# Allegro board QF7.820.6081-240911.brd
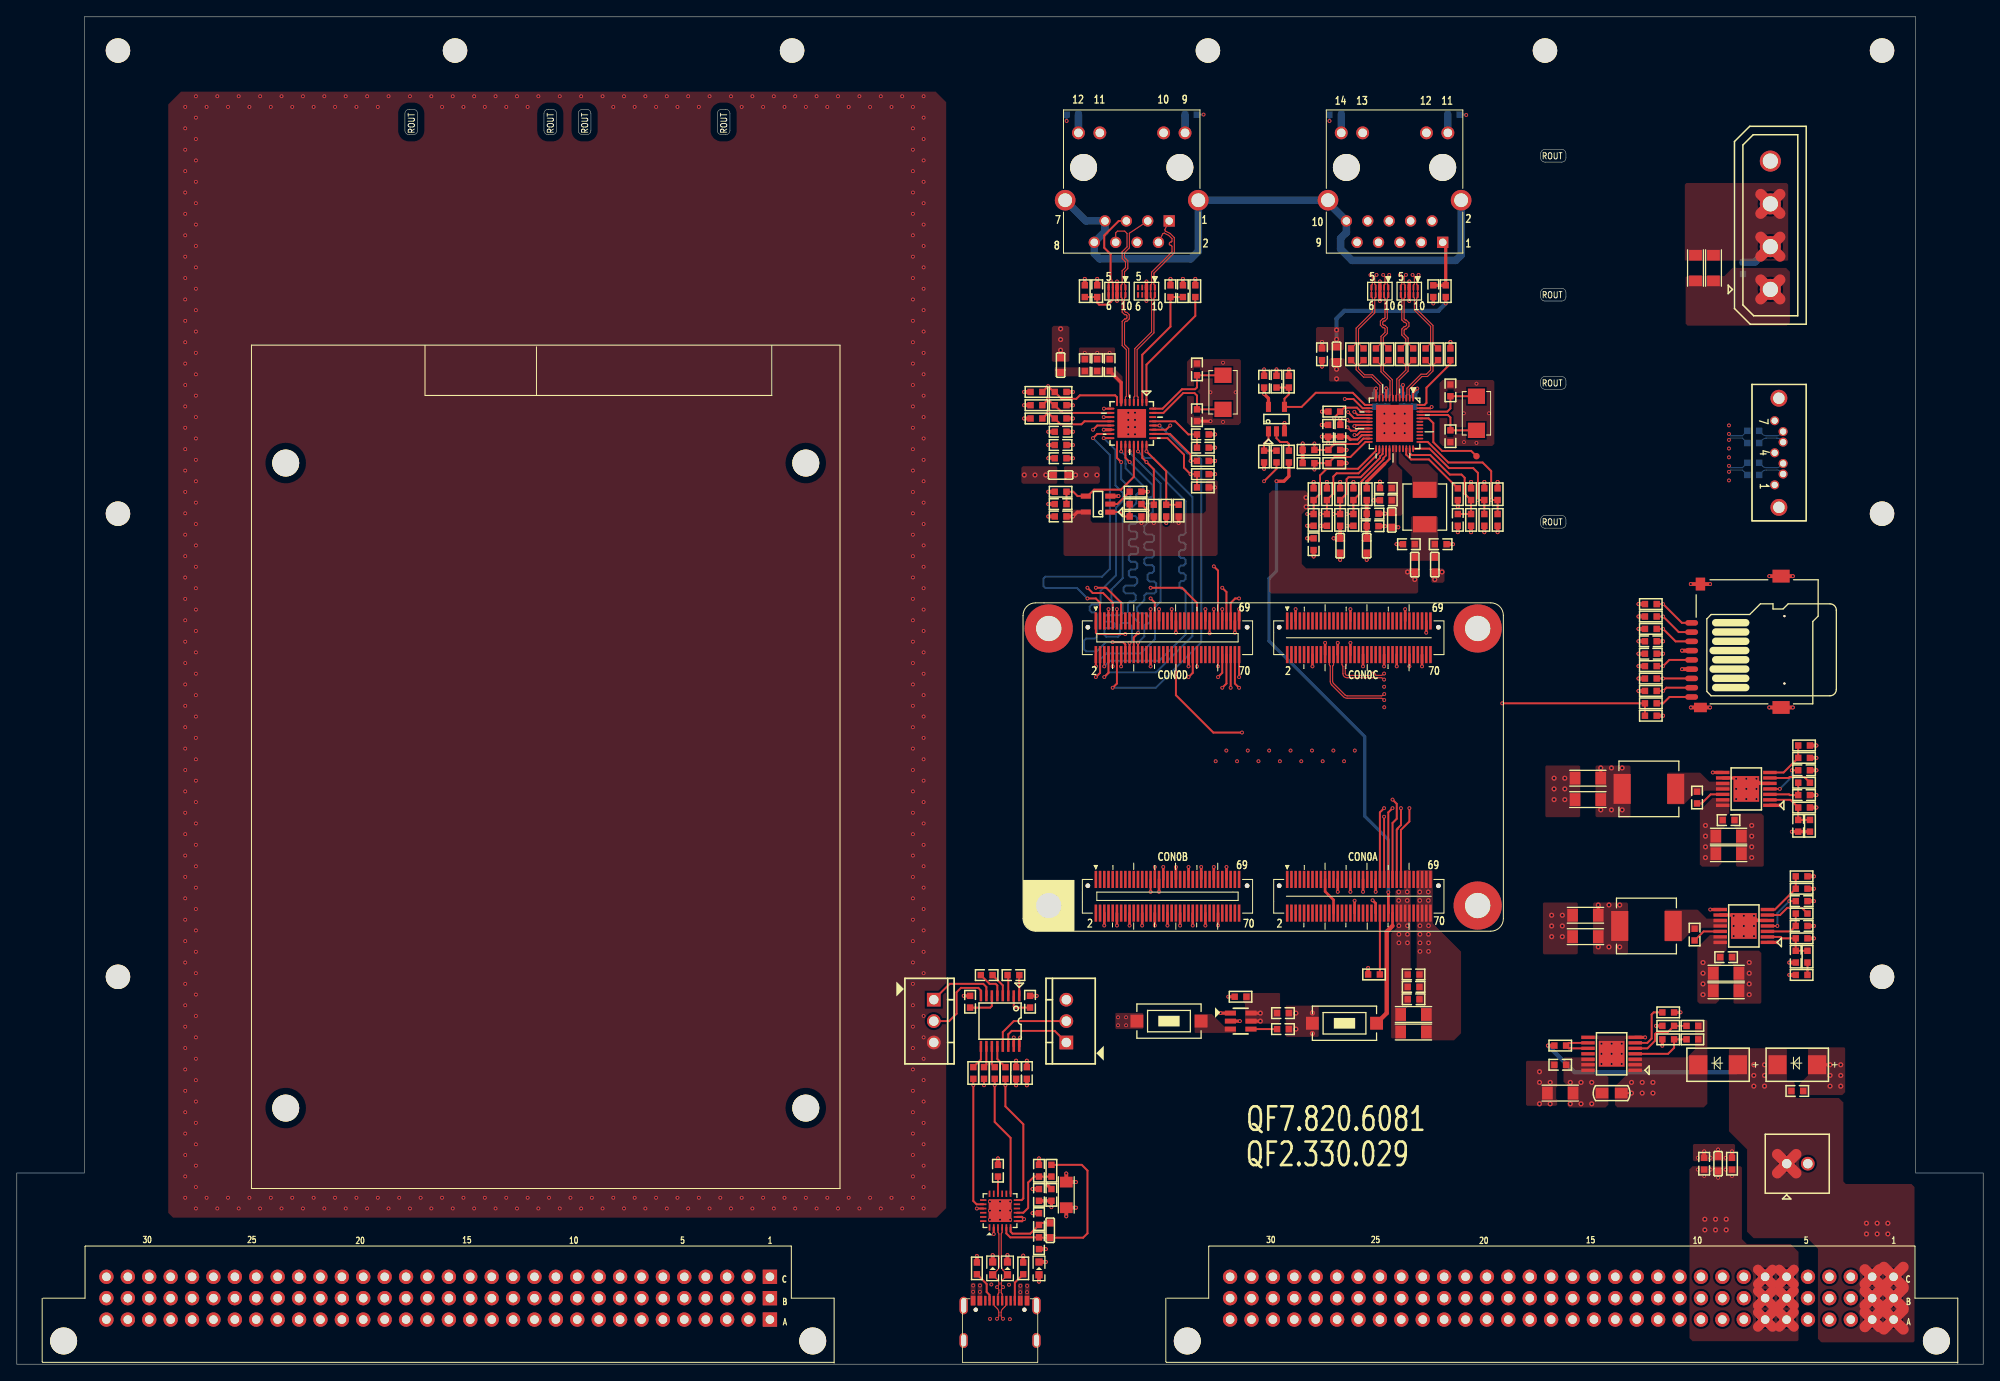
[diagram p0: board, top side]
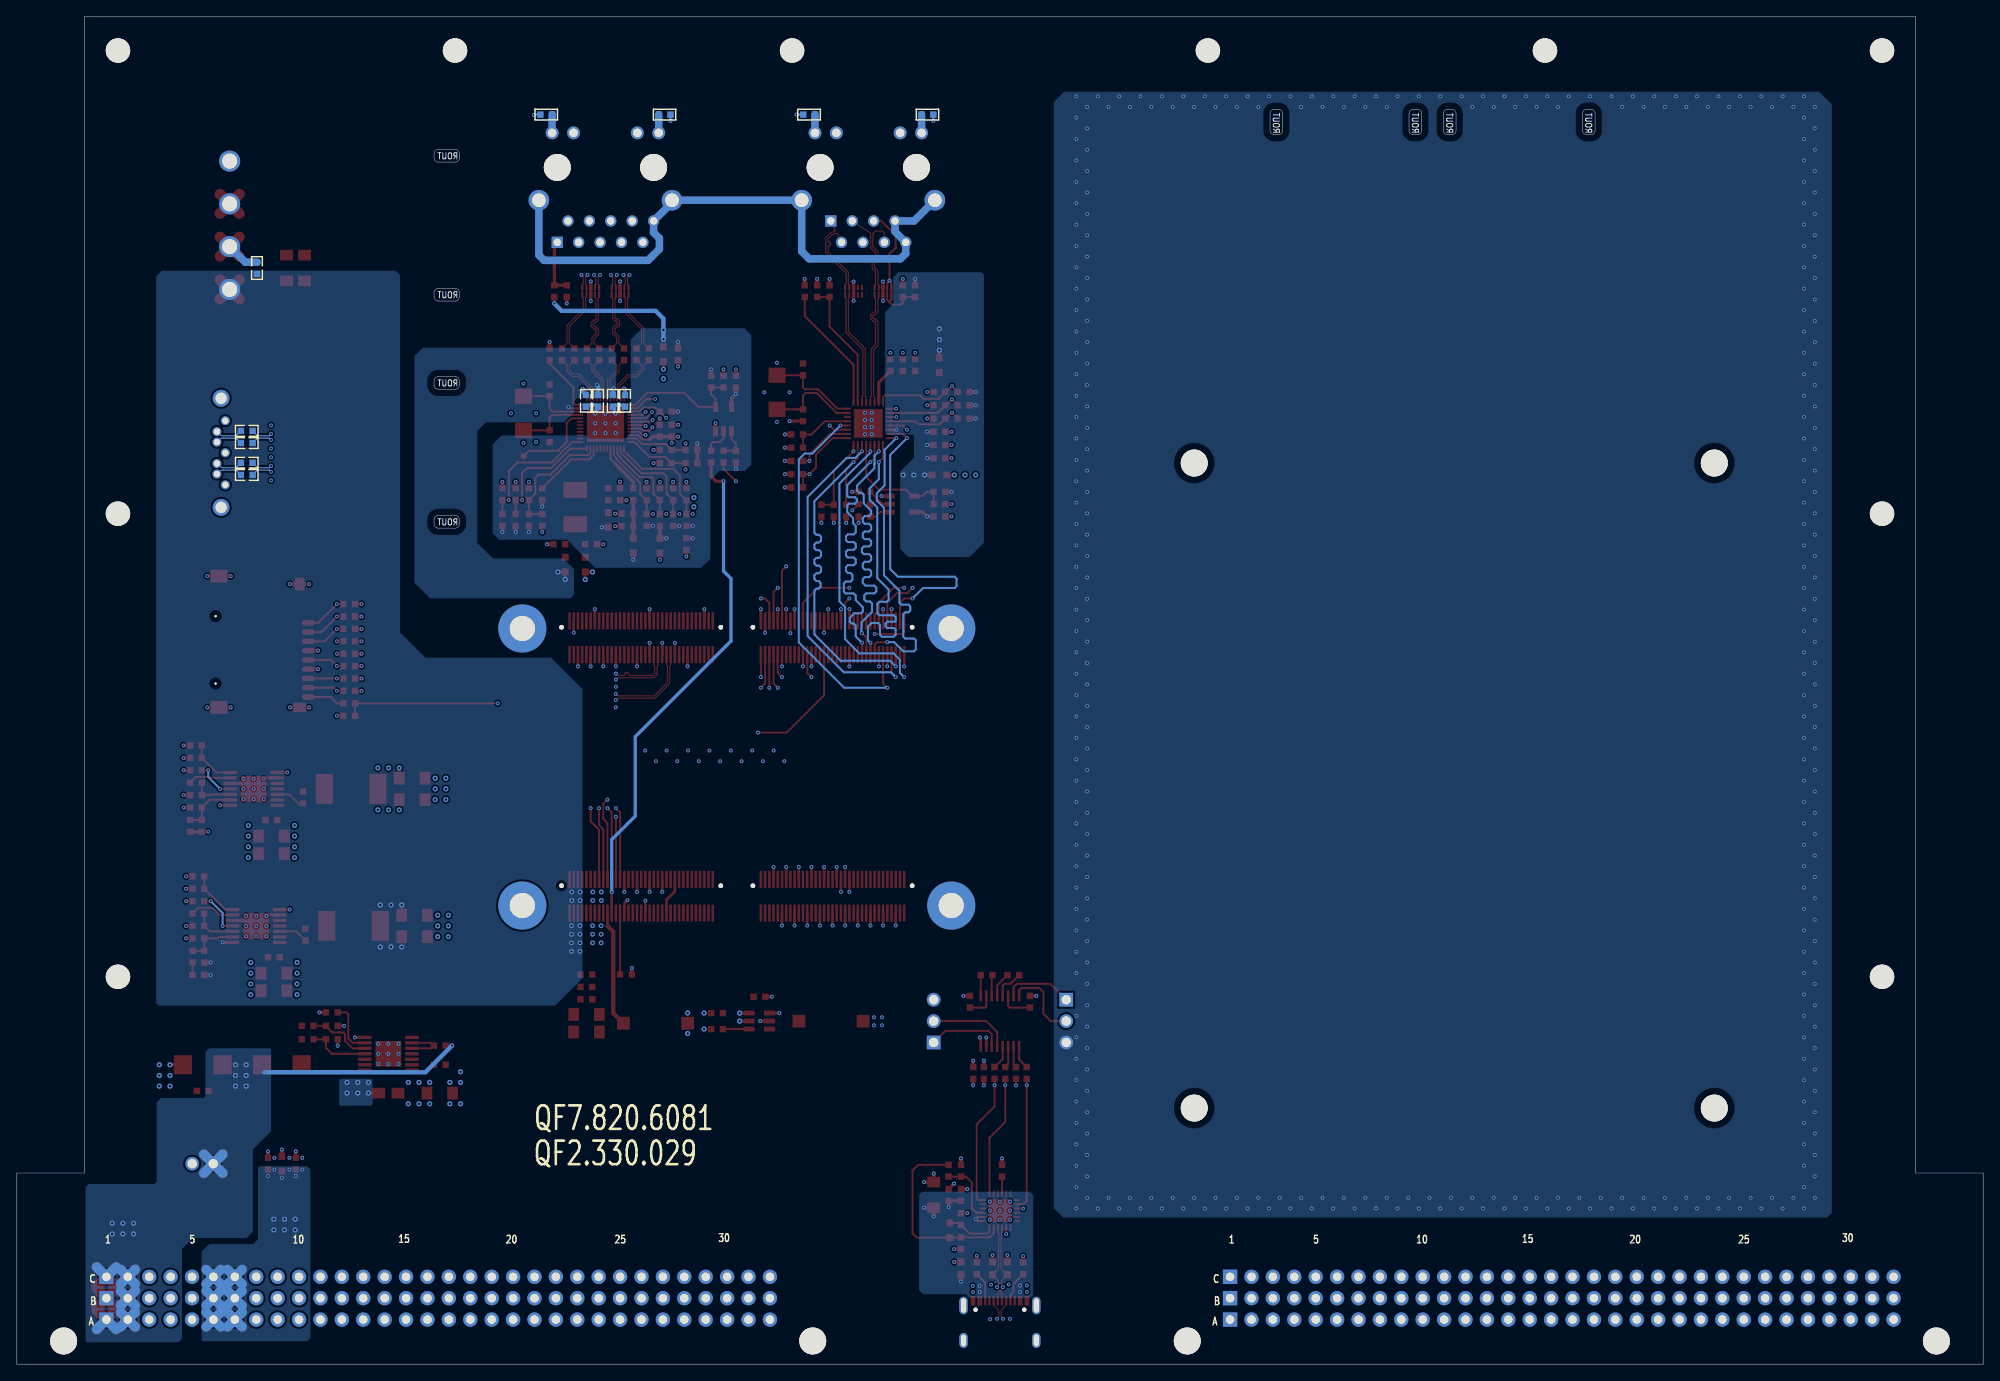
[diagram p1: board, bottom side, seen from below]

Outline 233.35 x 160 mm; copper layers: TOP, L2_GND, L3_VCC, L4-S, L5-GND, BOTTOM. Coordinates in mm from the lower left corner of the outline.
Outline path: 0,22.7 8,22.7 8,160 225.35,160 225.35,22.7 233.35,22.7 233.35,0 0,0 0,22.7 ; 46.05,148.51 46.05,146.51 arc(46.2,146.16) 46.55,146.01 47.05,146.01 arc(47.41,146.16) 47.55,146.51 47.55,148.51 arc(47.41,148.87) 47.05,149.01 46.55,149.01 arc(46.2,148.87) 46.05,148.51 ; 62.55,148.51 62.55,146.51 arc(62.7,146.16) 63.05,146.01 63.55,146.01 arc(63.91,146.16) 64.05,146.51 64.05,148.51 arc(63.91,148.87) 63.55,149.01 63.05,149.01 arc(62.7,148.87) 62.55,148.51 ; 66.63,148.51 arc(66.77,148.87) 67.13,149.01 67.63,149.01 arc(67.98,148.87) 68.13,148.51 68.13,146.51 arc(67.98,146.16) 67.63,146.01 67.13,146.01 arc(66.77,146.16) 66.63,146.51 66.63,148.51 ; 83.13,148.51 arc(83.27,148.87) 83.63,149.01 84.13,149.01 arc(84.48,148.87) 84.63,148.51 84.63,146.51 arc(84.48,146.16) 84.13,146.01 83.63,146.01 arc(83.27,146.16) 83.13,146.51 83.13,148.51 ; 180.84,143.75 180.84,143.25 arc(180.99,142.9) 181.34,142.75 183.34,142.75 arc(183.69,142.9) 183.84,143.25 183.84,143.75 arc(183.69,144.1) 183.34,144.25 181.34,144.25 arc(180.99,144.1) 180.84,143.75 ; 180.84,127.25 180.84,126.75 arc(180.99,126.4) 181.34,126.25 183.34,126.25 arc(183.69,126.4) 183.84,126.75 183.84,127.25 arc(183.69,127.6) 183.34,127.75 181.34,127.75 arc(180.99,127.6) 180.84,127.25 ; 180.84,116.78 180.84,116.28 arc(180.99,115.93) 181.34,115.78 183.34,115.78 arc(183.69,115.93) 183.84,116.28 183.84,116.78 arc(183.69,117.13) 183.34,117.28 181.34,117.28 arc(180.99,117.13) 180.84,116.78 ; 180.84,100.28 180.84,99.78 arc(180.99,99.43) 181.34,99.28 183.34,99.28 arc(183.69,99.43) 183.84,99.78 183.84,100.28 arc(183.69,100.63) 183.34,100.78 181.34,100.78 arc(180.99,100.63) 180.84,100.28

## Design rules (mm)
net group AA8/SATA_ESRXP: nets AA8/SATA_ESRXP N17010668
net group AA9/SATA_ESTXP: nets AA9/SATA_ESTXP N17010666
net group AB8/SATA_ESRXM: nets AB8/SATA_ESRXM N17010683
net group AB9/SATA_ESTXM: nets AB9/SATA_ESTXM N17010685
net group DP10: nets USB_D+ USB_D-
net group DP15: nets N15533886 N15533898
net group DP16: nets N15533888 N15533896
net group DP17: nets N15533890 N15533892
net group DP18: nets N15533884 N15533894
net group DP13: nets MDI1_P_D
net group POWER: nets AGND_AUDIO N15533766 N15534212 N15534402 N15538041 N16901725 N17001968 PMIC_PWRON SYS_RESETN/3V3 VDD_3V0_RTC VDD_3V3_DRG

## Placement (name value [footprint] x y rotation side)
C1  1u/25V  [C0603]  183.16 35.56 0 top
C2  22uF/25V  [C1206]  183.16 32.19 180 top
C3  1u/25V  [C0603]  211.29 32.44 180 top
C4  22uF/25V  [C1206]  202.85 46.42 0 top
C5  22uF/25V  [C1206]  202.85 44.34 0 top
C6  0.1u/50V  [C0603]  202.85 48.33 180 top
C7  22pF  [C0603]  211.11 48.39 270 top
C8  0.1u  [C0603]  199.11 51.01 270 top
C9  22uF  [C1206]  186.15 53.31 180 top
C10  22uF  [C1206]  186.15 50.77 180 top
C11  1u  [C0603]  211.81 52.04 180 top
C12  10nF  [C0603]  211.81 54.98 180 top
C13  22uF/25V  [C1206]  203.14 62.7 0 top
C14  22uF/25V  [C1206]  203.14 60.62 0 top
C15  0.1u/50V  [C0603]  203.14 64.61 180 top
C16  22pF  [C0603]  211.4 63.93 270 top
C17  22uF  [C1206]  186.44 67.04 180 top
C18  22uF  [C1206]  186.44 69.58 180 top
C19  0.1u  [C0603]  199.4 67.29 270 top
C20  1u  [C0603]  212.1 67.58 180 top
C21  10nF  [C0603]  212.1 70.52 180 top
C22  0.1u  [C0603]  165.76 44.8 180 top
C23  0.1u  [C0603]  165.76 46.28 180 top
C24  0.1u  [C0603]  165.76 43.33 180 top
C25  47u/16V  [C1206]  165.75 41.53 180 top
C26  47u/16V  [C1206]  165.75 39.44 180 top
C27  0.1u  [C0603]  150.25 41.69 180 top
C28  10nF  [C0603]  150.25 39.79 180 top
C29  10uF_25V  [C0603]  118.59 34.58 90 top
C30  0.1uF,25V  [C0603]  119.86 34.58 90 top
C31  0.1uF,25V  [C0603]  118.27 46.2 180 top
C32  0.1uF,25V  [C0603]  115.09 46.2 180 top
C33  0.1uF,25V  [C0603]  120.24 43.04 90 top
C34  0.1uF,25V  [C0603]  113.13 43.04 90 top
C35  4.7uF_16V  [C0603]  121.3 17.23 90 top
C36  100nF  [C0603]  121.3 14.36 270 top
C37  4.7uF_16V  [C0603]  116.43 22.97 90 top
C38  10uF_16V  [C1206]  124.54 20.1 90 top
C39  100nF  [C0603]  121.3 20.1 90 top
C40  100nF  [C0603]  122.78 20.1 90 top
C41  1uF_16V  [C0603]  121.3 22.97 90 top
C42  10nF  [C0603]  206.06 105.6 0 bottom
C43  10nF  [C0603]  206.06 107.05 0 bottom
C44  10nF  [C0603]  206.06 109.39 0 bottom
C45  10nF  [C0603]  206.06 110.84 0 bottom
C46  0.1u  [C0603]  193.91 84.37 180 top
C47  10uF  [C0603]  193.91 85.84 180 top
C48  47u/16V  [C1206]  201.35 130.17 90 top
C49  47u/16V  [C1206]  199.21 130.17 90 top
C50  0.1u  [C0603]  204.85 130.17 90 bottom
C51  0.1u  [C0603]  168.1 127.42 90 top
C52  12pF  [C0603]  170.13 115.64 270 top
C53  12pF  [C0603]  170.13 110.2 90 top
C54  0.1u  [C0603]  148.02 116.68 90 top
C55  10uF  [C0603]  168.97 97.37 0 top
C56  0.1u  [C0603]  165.2 97.37 180 top
C57  0.1u  [C0603]  171 100.26 270 top
C58  1u  [C0603]  149.49 116.68 90 top
C59  10uF  [C0603]  161.18 114.4 270 bottom
C60  0.1u  [C0603]  165.82 114.4 270 bottom
C61  10uF  [C0603]  162.47 102.59 180 top
C62  0.1u  [C0603]  162.47 104.04 180 top
C63  10uF  [C0603]  160.89 101 0 top
C64  0.1u  [C0603]  160.89 99.52 0 top
C65  10uF  [C0603]  153.89 97.37 270 top
C66  0.1u  [C0603]  154.89 119.93 270 top
C67  10uF  [C0603]  162.62 114.4 270 bottom
C68  0.1u  [C0603]  164.38 114.4 270 bottom
C69  10uF  [C0603]  157.07 110.85 90 top
C70  0.1u  [C0603]  155.62 110.85 90 top
C71  12pF  [C0603]  140.05 118.13 270 top
C72  12pF  [C0603]  140.05 112.69 90 top
C73  10uF  [C0603]  129.68 118.64 90 top
C74  0.1u  [C0603]  126.74 118.64 90 top
C75  1u  [C0603]  128.21 118.64 270 top
C76  10uF  [C0603]  123.87 107.58 180 top
C77  0.1u  [C0603]  123.87 110.73 180 top
C78  1u  [C0603]  123.87 109.15 0 top
C79  0.1u  [C0603]  140.75 110.41 0 top
C80  1u  [C0603]  140.75 108.84 180 top
C81  0.1u  [C0603]  138.38 127.42 90 top
C82  1u  [C0603]  136.9 127.42 270 top
C83  0.1u  [C0603]  123.87 100.67 180 top
C84  1u  [C0603]  123.87 102.14 180 top
C85  0.1u  [C0603]  128.21 127.42 90 top
C86  1000p  [C0603]  200.24 23.81 90 top
CON1  SOM-TLT3_A40i  [SOM-TLA40I-B]  147.91 70.91 0 top
D1  TPS3808G33DBVR  [SOT23_6]  145.24 40.74 270 top
D2  SIT3232EEUE  [TSSOP16]  116.68 40.74 180 top
D3  CP2105-F01-GM  [QFN-24]  116.68 18.23 90 top
D4  YT8521SH-CA  [QFN48]  163.5 111.72 180 top
D5  NC7SZ08M5  [SOT23_5]  149.49 112.23 0 top
D6  YT8512H  [QFN32]  132.31 111.72 180 top
D7  NC7SZ08M5  [SOT23_5]  128.31 102.14 90 top
FB1  220R_100MHz_2A  [FB0603]  122.63 15.9 270 top
FB2  BLM18PG121SN1  [FB0603]  201.89 23.81 270 top
FB3  BLM18PG121SN1  [FB0603]  157.04 97.2 90 top
FB4  BLM18PG121SN1  [FB0603]  165.9 94.95 270 top
FB5  BLM18PG121SN1  [FB0603]  160.19 97.2 90 top
FB6  BLM18PG121SN1  [FB0603]  163.16 100.26 90 top
FB7  BLM18PG121SN1  [FB0603]  168.27 94.95 270 top
FB8  BLM18PG121SN1  [FB0603]  156.62 119.93 270 top
FB9  BLM18PG121SN1/nc  [FB0603]  123.87 105.59 0 top
FB10  BLM18PG121SN1  [FB0603]  123.87 118.64 270 top
J1  XH254-2  [XH254_2_0]  211.29 23.81 0 top
J2  CON3  [XH254-3]  124.55 40.74 0 top
J3  CON3  [XH254-3]  108.82 40.74 180 top
J4  KH-TYPE-C-16P  [TYPE-C_16P_90_SMD]  116.68 3.99 0 top
J5  SATA_7PIN_DIP  [CON_SATA_7PIN]  209.11 114.71 270 top
J6  SATA_IDE_DIP_4Pin  [SATA-IDE4M_5R08_DIP]  208.1 127.63 90 top
J7  TF  [TF-CARD-A]  206.78 85.78 90 top
J8  -  [HR915320AE]  163.5 148.94 0 top
J9  -  [HR915310AE]  132.31 148.94 0 top
L1  SPM6530T-3R3  [SPM6530]  193.39 52.04 180 top
L2  SPM6530T-2R2  [SPM6530]  193.68 68.31 180 top
L3  MWSA0420S-2R2MT  [SMD_LDPC0530RCP]  167.08 101.79 270 top
NOREF  -  [unnamed]  181.35 156 0 top
NOREF#2  -  [unnamed]  12 46 0 top
NOREF#3  -  [unnamed]  221.35 101 0 top
NOREF#4  -  [unnamed]  12 156 0 top
NOREF#5  -  [unnamed]  52 156 0 top
NOREF#6  -  [unnamed#2]  62.77 121.01 180 top
NOREF#7  -  [unnamed]  221.35 46 0 top
NOREF#8  -  [unnamed]  92 156 0 top
NOREF#9  -  [unnamed]  141.35 156 0 top
NOREF#10  -  [unnamed]  221.35 156 0 top
NOREF#11  -  [unnamed]  12 101 0 top
R1  2.2M  [R0603]  198.85 40.17 0 top
R2  2.2M  [R0603]  198.85 38.57 0 top
R3  10K  [R0603]  183.16 37.83 0 top
R4  5.6K  [R0603]  195.97 41.77 180 top
R5  240K  [R0603]  195.97 40.17 0 top
R6  560K  [R0603]  195.97 38.57 0 top
R7  0R  [R0603]  211.81 46.22 180 top
R8  124K  [R0603]  212.5 48.39 270 top
R9  22.1K  [R0603]  211.81 50.57 180 top
R10  90.9K  [R0603]  211.81 57.93 0 top
R11  30.1K  [R0603]  211.81 56.46 180 top
R12  73.2K  [R0603]  212.8 63.93 270 top
R13  22.1K  [R0603]  212.1 66.1 180 top
R14  90.9K  [R0603]  212.1 73.47 0 top
R15  30.1K  [R0603]  212.1 72 180 top
R16  0R/NC  [R0603]  161.06 46.28 0 top
R17  10K  [R0603]  145.22 43.64 0 top
R18  0/nc  [R0603]  116.05 34.58 270 top
R19  0/nc  [R0603]  117.32 34.58 270 top
R20  0/nc  [R0603]  114.78 34.58 270 top
R21  0/nc  [R0603]  113.51 34.58 270 top
R22  5.1K_1%  [R0603]  113.93 11.38 90 top
R23  5.1K_1%  [R0603]  119.43 11.38 90 top
R24  10K_1%  [R0603]  122.78 22.97 270 top
R25  10K  [R0603]  193.91 77 180 top
R26  10K  [R0603]  193.91 79.95 0 top
R27  10K  [R0603]  193.91 81.42 0 top
R28  10K  [R0603]  193.91 82.9 0 top
R29  10K  [R0603]  193.91 87.32 0 top
R30  10K  [R0603]  193.91 88.79 0 top
R31  10K  [R0603]  193.91 90.26 0 top
R32  33R  [R0603]  193.91 78.48 0 top
R33  DNP_4K7_1%  [R0603]  171 103.31 270 top
R34  0R  [R0603]  160.19 103.31 270 top
R35  4.7K  [R0603]  156.34 113.12 0 top
R36  DNP_0R_1%  [R0603]  169.57 127.42 90 top
R37  0R  [R0603]  168.66 119.93 90 top
R38  0R  [R0603]  167.18 119.93 90 top
R39  0R  [R0603]  164.24 119.93 90 top
R40  0R  [R0603]  161.29 119.93 90 top
R41  0R  [R0603]  165.71 119.93 90 top
R42  0R  [R0603]  162.76 119.93 90 top
R43  0R  [R0603]  159.82 119.93 90 top
R44  0R  [R0603]  158.34 119.93 90 top
R45  330R  [R0603]  170.52 148.39 180 bottom
R46  NC  [R0603]  156.48 148.39 0 bottom
R47  10K  [R0603]  148.01 107.79 270 top
R48  2K49  [R0603]  170.13 119.93 270 top
R49  0R  [R0603]  150.96 107.79 90 top
R50  10K  [R0603]  150.95 116.68 90 top
R51  DNP_4K7_1%  [R0603]  157.04 100.26 270 top
R52  DNP_4K7_1%  [R0603]  158.62 100.26 270 top
R53  DNP_4K7_1%  [R0603]  172.58 100.26 270 top
R54  4.7K  [R0603]  157.04 103.31 270 top
R55  4.7K  [R0603]  158.62 103.31 270 top
R56  4.7K  [R0603]  172.58 103.31 270 top
R57  DNP_4K7_1%  [R0603]  153.89 100.26 270 top
R58  DNP_4K7_1%  [R0603]  153.29 107 180 top
R59  DNP_4K7_1%  [R0603]  153.29 108.57 180 top
R60  DNP_4K7_1%  [R0603]  174.15 100.26 270 top
R61  DNP_4K7_1%  [R0603]  175.73 100.26 270 top
R62  4.7K  [R0603]  155.47 100.26 270 top
R63  4.7K  [R0603]  153.89 103.31 270 top
R64  4.7K  [R0603]  156.34 107 180 top
R65  4.7K  [R0603]  156.34 108.57 180 top
R66  4.7K  [R0603]  174.15 103.31 270 top
R67  4.7K  [R0603]  175.73 103.31 270 top
R68  DNP_4K7_1%  [R0603]  155.47 103.31 270 top
R69  2K49  [R0603]  139.85 127.42 90 top
R70  10K  [R0603]  132.76 100.66 0 top
R71  10K  [R0603]  123.87 103.6 0 top
R72  0R  [R0603]  132.76 103.61 180 top
R73  DNP_0R_1%  [R0603]  126.74 127.42 90 top
R74  4.7K  [R0603]  140.75 107.26 0 top
R75  4.7K  [R0603]  134.93 101.36 90 top
R76  NC  [R0603]  125.28 148.39 0 bottom
R77  DNP_4K7_1%  [R0603]  137.88 101.36 270 top
R78  DNP_4K7_1%  [R0603]  140.75 104.11 0 top
R79  330R  [R0603]  139.33 148.39 180 bottom
R80  4.7K  [R0603]  136.4 101.36 90 top
R81  4.7K  [R0603]  140.75 105.69 180 top
R82  DNP_4K7_1%  [R0603]  121 115.45 180 top
R83  DNP_4K7_1%  [R0603]  121 112.3 180 top
R84  DNP_4K7_1%  [R0603]  121 113.88 180 top
R85  4.7K  [R0603]  123.87 115.45 0 top
R86  4.7K  [R0603]  123.87 112.3 0 top
R87  4.7K  [R0603]  123.87 113.88 0 top
R88  1M  [R0603]  203.55 23.81 90 top
R90  NC/10K  [R0603]  211.81 53.51 0 top
R91  NC/10K  [R0603]  212.1 69.05 0 top
R126  0R  [R0603]  149.49 107.79 90 top
R149  0R  [R0603]  132.76 102.14 180 top
RJ1  0R/NC  [R0805]  188.11 32.19 0 top
SW1  BTN  [SMD-BTN-2]  157.56 40.48 180 top
SW2  BTN  [SMD-BTN-2]  136.73 40.74 0 top
TP1  DNP_TP30  [TP30]  173.22 107.83 0 top
U1  MAX14571EUD+T  [TSSOP14_TP]  192.06 34.91 180 top
U2  TPS54626PWP  [TSSOP14_TP]  207.75 50.09 180 top
U3  TPS54626PWP  [TSSOP14_TP]  208.04 66.36 180 top
V1  SMBJ12CA  [D1808A]  208.94 35.56 0 top
V2  PESDALC10N5VU  [DFN-10-2510]  165.24 127.42 180 top
V3  PESDALC10N5VU  [DFN-10-2510]  161.75 127.42 180 top
V4  PESDALC10N5VU  [DFN-10-2510]  134.05 127.42 180 top
V5  PESDALC10N5VU  [DFN-10-2510]  130.56 127.42 180 top
V6  SS34  [D1808A]  199.54 35.56 0 top
V13  PESD5V0  [LED0603]  121.3 11.38 90 top
V14  PESD5V0  [LED0603]  117.56 11.38 90 top
V15  PESD5V0  [LED0603]  115.81 11.38 90 top
X1  DIN96  [9001-1396]  138.9 2.75 0 top
X2  DIN96  [9001-1396]  5.55 2.75 0 top
Y1  X53T-G20SSA-25MHz-C  [OSC_5032]  173.22 112.92 270 top
Y2  X53T-G20SSA-25MHz-C  [OSC_5032]  143.14 115.41 270 top

## Library data of the parts
C1 C3 C6-C8 C11 C12 C15 C16 C19-C24 C27 C28 C35-C41 C85 C86 = CAPACITOR NON-POL
C2 C4 C5 C9 C10 C13 C14 C17 C18 C25 C26 C48 C49 = CAP
C29-C34 C46 C47 C50-C53 C71 C72 = CAP NP
C42-C45 = CAP NP: signal model: 0603
C54-C70 C73 C74 C76 C77 C79 C81 C83 C84 = 11_C_0
C75 C78 C80 C82 = CAP_C53
CON1 = SOM-TLT3_A40i-B_1
D1 = TPS3808
D2 = MAX232A_0
D3 = CP2105_4
D4 = YT8521S
D5 = 74LVC1G08
D6 = YT8512H_1: room: 6
D7 = 74LVC1G08: room: 6
FB1-FB10 = FERRITE BEAD
J1 = CON2
J2 J3 = CON3
J4 = usb 3_0.0 type-c female: room: 10
J5 = SATA-VERT
J6 = SATA_IDE_DIP_0: room: 4
J7 = TF
J8 = KRJ-320DNL_2: room: ecat1
J9 = ETHERNET CONNECTER
L1 L2 = INDUCTOR IRON
L3 = 1211_CHOKE_0: User Part Number: HAMP; Tolerance: #TOL
R1-R15 R17 R79 R90 R91 = R
R16 R22 R23 = R 1%
R18-R21 R24-R31 R38-R42 R45-R49 R69 R70 R72 R126 R149 = 10_R_0
R32 R36 R37 R43 R44 = 10_R_0: room: RS232
R33-R35 = 0R 1%/0402: room: RS232
R50-R68 R71 R74 R75 R77 R78 R82-R86 RJ1 = 0R 1%/0402
R73 = 1R_ZeroOhmResistor1/16W0402
R76 R88 = R: room: JTAG
R80 R81 R87 = 0R 1%/0402: room: JTAG
SW1 SW2 = SW PUSHBUTTON
TP1 = T POINT R
U1 = MAX14571_0
U2 U3 = TPS54626
V1 V6 = SCHOTTKY
V2-V5 = SU099PGTR
V13-V15 = ZENOR_0
X1 X2 = DIN96
Y1 Y2 = ZTB

## Footprints (pads in the part's own frame, mm; a bottom-side part is the same pattern mirrored in y, then rotated)
9001-1396
  round 3.2 hole 3.2 unplated: (0,0) (88.9,0)
  rect 1.7x1.7 hole 1.016: 1(83.82,2.54) 33(83.82,5.08) 65(83.82,7.62)
  round 1.7 hole 1.016: 2(81.28,2.54) 3(78.74,2.54) 4(76.2,2.54) 5(73.66,2.54) 6(71.12,2.54) 7(68.58,2.54) 8(66.04,2.54) 9(63.5,2.54) 10(60.96,2.54) 11(58.42,2.54) 12(55.88,2.54) 13(53.34,2.54) 14(50.8,2.54) 15(48.26,2.54) 16(45.72,2.54) 17(43.18,2.54) 18(40.64,2.54) 19(38.1,2.54) 20(35.56,2.54) 21(33.02,2.54) 22(30.48,2.54) 23(27.94,2.54) 24(25.4,2.54) 25(22.86,2.54) 26(20.32,2.54) 27(17.78,2.54) 28(15.24,2.54) 29(12.7,2.54) 30(10.16,2.54) 31(7.62,2.54) 32(5.08,2.54) 34(81.28,5.08) 35(78.74,5.08) 36(76.2,5.08) 37(73.66,5.08) 38(71.12,5.08) 39(68.58,5.08) 40(66.04,5.08) 41(63.5,5.08) 42(60.96,5.08) 43(58.42,5.08) 44(55.88,5.08) 45(53.34,5.08) 46(50.8,5.08) 47(48.26,5.08) 48(45.72,5.08) 49(43.18,5.08) 50(40.64,5.08) 51(38.1,5.08) 52(35.56,5.08) 53(33.02,5.08) 54(30.48,5.08) 55(27.94,5.08) 56(25.4,5.08) 57(22.86,5.08) 58(20.32,5.08) 59(17.78,5.08) 60(15.24,5.08) 61(12.7,5.08) 62(10.16,5.08) 63(7.62,5.08) 64(5.08,5.08) 66(81.28,7.62) 67(78.74,7.62) 68(76.2,7.62) 69(73.66,7.62) 70(71.12,7.62) 71(68.58,7.62) 72(66.04,7.62) 73(63.5,7.62) 74(60.96,7.62) 75(58.42,7.62) 76(55.88,7.62) 77(53.34,7.62) 78(50.8,7.62) 79(48.26,7.62) 80(45.72,7.62) 81(43.18,7.62) 82(40.64,7.62) 83(38.1,7.62) 84(35.56,7.62) 85(33.02,7.62) 86(30.48,7.62) 87(27.94,7.62) 88(25.4,7.62) 89(22.86,7.62) 90(20.32,7.62) 91(17.78,7.62) 92(15.24,7.62) 93(12.7,7.62) 94(10.16,7.62) 95(7.62,7.62) 96(5.08,7.62)
C0603
  rect 0.762x0.762 smd: 1(-0.699,0) 2(0.699,0)
C1206
  rect 1.27x1.524 smd: 1(-1.524,0) 2(1.524,0)
CON_SATA_7PIN
  round 2 hole 1.35: (0,0) (12.96,0)
  round 1.07 hole 0.75: 1(10.29,-0.5) 2(9,0.5) 3(7.75,0.5) 4(6.48,-0.5) 5(5.21,0.5) 6(3.96,0.5) 7(2.67,-0.5)
D1808A
  rect 2.16x2.26 smd: 1(0,0) 2(4.7,0)
DFN-10-2510
  rect 0.254x0.66 smd: 1(-1,-0.437) 5(1,-0.437) 6(1,0.437) 10(-1,0.437)
  rect 0.203x0.66 smd: 2(-0.5,-0.437) 4(0.5,-0.437) 7(0.5,0.437) 9(-0.5,0.437)
  rect 0.406x0.66 smd: 3(0,-0.437) 8(0,0.437)
FB0603
  rect 0.85x0.8 smd: 1(-0.875,0) 2(0.875,0)
HR915310AE
  round 3.2 hole 3.2 unplated: (-5.715,-6.83) (5.715,-6.83)
  rect 1.34x1.34 hole 0.89: 1(4.445,-13.18)
  round 1.34 hole 0.89: 2(3.175,-15.72) 3(1.905,-13.18) 4(0.635,-15.72) 5(-0.635,-13.18) 6(-1.905,-15.72) 7(-3.175,-13.18) 8(-4.445,-15.72)
  round 1.53 hole 1.02: 9(6.325,-2.72) 10(3.785,-2.72) 11(-3.785,-2.72) 12(-6.325,-2.72)
  round 2.45 hole 1.63: 15(-7.9,-10.72) 16(7.9,-10.72)
HR915320AE
  round 3.2 hole 3.2 unplated: (-5.715,-6.83) (5.715,-6.83)
  rect 1.34x1.34 hole 0.89: 1(5.715,-15.72)
  round 1.34 hole 0.89: 2(4.445,-13.18) 3(3.175,-15.72) 4(1.905,-13.18) 5(0.635,-15.72) 6(-0.635,-13.18) 7(-1.905,-15.72) 8(-3.175,-13.18) 9(-4.445,-15.72) 10(-5.715,-13.18)
  round 1.53 hole 1.02: 11(6.325,-2.72) 12(3.785,-2.72) 13(-3.785,-2.72) 14(-6.325,-2.72)
  round 2.45 hole 1.63: 17(-7.9,-10.72) 18(7.9,-10.72)
LED0603
  rect 0.864x0.864 smd: 1(-0.762,0) 2(0.762,0)
OSC_5032
  rect 1.82x2.03 smd: 1(-2.024,0) 2(2.024,0)
QFN32
  custom 0.23x0.85 smd: 1(-1.75,-2.475) 2(-1.25,-2.475) 3(-0.75,-2.475) 4(-0.25,-2.475) 5(0.25,-2.475) 6(0.75,-2.475) 7(1.25,-2.475) 8(1.75,-2.475) 17(1.75,2.475) 18(1.25,2.475) 19(0.75,2.475) 20(0.25,2.475) 21(-0.25,2.475) 22(-0.75,2.475) 23(-1.25,2.475) 24(-1.75,2.475)
  custom 0.85x0.23 smd: 9(2.475,-1.75) 10(2.475,-1.25) 11(2.475,-0.75) 12(2.475,-0.25) 13(2.475,0.25) 14(2.475,0.75) 15(2.475,1.25) 16(2.475,1.75) 25(-2.475,1.75) 26(-2.475,1.25) 27(-2.475,0.75) 28(-2.475,0.25) 29(-2.475,-0.25) 30(-2.475,-0.75) 31(-2.475,-1.25) 32(-2.475,-1.75)
  rect 3.4x3.4 smd: 33(0,0)
QFN48
  oval 0.203x0.813 smd: 1(-2.2,-3) 2(-1.8,-3) 3(-1.4,-3) 4(-1,-3) 5(-0.6,-3) 6(-0.2,-3) 7(0.2,-3) 8(0.6,-3) 9(1,-3) 10(1.4,-3) 11(1.8,-3) 12(2.2,-3) 25(2.2,3) 26(1.8,3) 27(1.4,3) 28(1,3) 29(0.6,3) 30(0.2,3) 31(-0.2,3) 32(-0.6,3) 33(-1,3) 34(-1.4,3) 35(-1.8,3) 36(-2.2,3)
  oval 0.813x0.203 smd: 13(3,-2.2) 14(3,-1.8) 15(3,-1.4) 16(3,-1) 17(3,-0.6) 18(3,-0.2) 19(3,0.2) 20(3,0.6) 21(3,1) 22(3,1.4) 23(3,1.8) 24(3,2.2) 37(-3,2.2) 38(-3,1.8) 39(-3,1.4) 40(-3,1) 41(-3,0.6) 42(-3,0.2) 43(-3,-0.2) 44(-3,-0.6) 45(-3,-1) 46(-3,-1.4) 47(-3,-1.8) 48(-3,-2.2)
  rect 4.394x4.394 smd: 49(0,0)
QFN-24
  rect 0.75x0.2 smd: 1(-2,1.25) 2(-2,0.75) 3(-2,0.25) 4(-2,-0.25) 5(-2,-0.75) 6(-2,-1.25) 13(2,-1.25) 14(2,-0.75) 15(2,-0.25) 16(2,0.25) 17(2,0.75) 18(2,1.25)
  rect 0.2x0.75 smd: 7(-1.25,-2) 8(-0.75,-2) 9(-0.25,-2) 10(0.25,-2) 11(0.75,-2) 12(1.25,-2) 19(1.25,2) 20(0.75,2) 21(0.25,2) 22(-0.25,2) 23(-0.75,2) 24(-1.25,2)
  rect 2.7x2.7 smd: 25(0,0)
R0603
  rect 0.762x0.762 smd: 1(-0.699,0) 2(0.699,0)
R0805
  rect 1.524x1.27 smd: 1(0,0) 2(2.286,0)
SATA-IDE4M_5R08_DIP
  round 2.5 hole 1.8: 1(0,0) 2(5.08,0) 3(10.16,0) 4(15.24,0)
SMD-BTN-2
  rect 1.524x1.524 smd: 1(-3.81,0) 2(3.81,0)
SMD_LDPC0530RCP
  rect 1.905x2.794 smd: 1(-2.045,0) 2(2.045,0)
SOM-TLA40I-B
  round 0.55 hole 0.55 unplated: (-20.811,16.599) (-20.811,-14.099) (-1.912,16.599) (-1.912,-14.099) (1.897,16.599) (1.897,-14.099) (20.797,16.599) (20.797,-14.099)
  rect 0.305x2.032 smd: A1(2.847,-13.349) A2(2.847,-17.349) A3(3.347,-13.349) A4(3.347,-17.349) A5(3.847,-13.349) A6(3.847,-17.349) A7(4.347,-13.349) A8(4.347,-17.349) A9(4.847,-13.349) A10(4.847,-17.349) A11(5.347,-13.349) A12(5.347,-17.349) A13(5.847,-13.349) A14(5.847,-17.349) A15(6.347,-13.349) A16(6.347,-17.349) A17(6.847,-13.349) A18(6.847,-17.349) A19(7.347,-13.349) A20(7.347,-17.349) A21(7.847,-13.349) A22(7.847,-17.349) A23(8.347,-13.349) A24(8.347,-17.349) A25(8.847,-13.349) A26(8.847,-17.349) A27(9.347,-13.349) A28(9.347,-17.349) A29(9.847,-13.349) A30(9.847,-17.349) A31(10.347,-13.349) A32(10.347,-17.349) A33(10.847,-13.349) A34(10.847,-17.349) A35(11.347,-13.349) A36(11.347,-17.349) A37(11.847,-13.349) A38(11.847,-17.349) A39(12.347,-13.349) A40(12.347,-17.349) A41(12.847,-13.349) A42(12.847,-17.349) A43(13.347,-13.349) A44(13.347,-17.349) A45(13.847,-13.349) A46(13.847,-17.349) A47(14.347,-13.349) A48(14.347,-17.349) A49(14.847,-13.349) A50(14.847,-17.349) A51(15.347,-13.349) A52(15.347,-17.349) A53(15.847,-13.349) A54(15.847,-17.349) A55(16.347,-13.349) A56(16.347,-17.349) A57(16.847,-13.349) A58(16.847,-17.349) A59(17.347,-13.349) A60(17.347,-17.349) A61(17.847,-13.349) A62(17.847,-17.349) A63(18.347,-13.349) A64(18.347,-17.349) A65(18.847,-13.349) A66(18.847,-17.349) A67(19.347,-13.349) A68(19.347,-17.349) A69(19.847,-13.349) A70(19.847,-17.349) B1(-19.862,-13.349) B2(-19.862,-17.349) B3(-19.362,-13.349) B4(-19.362,-17.349) B5(-18.862,-13.349) B6(-18.862,-17.349) B7(-18.362,-13.349) B8(-18.362,-17.349) B9(-17.862,-13.349) B10(-17.862,-17.349) B11(-17.362,-13.349) B12(-17.362,-17.349) B13(-16.862,-13.349) B14(-16.862,-17.349) B15(-16.362,-13.349) B16(-16.362,-17.349) B17(-15.862,-13.349) B18(-15.862,-17.349) B19(-15.362,-13.349) B20(-15.362,-17.349) B21(-14.861,-13.349) B22(-14.861,-17.349) B23(-14.362,-13.349) B24(-14.362,-17.349) B25(-13.861,-13.349) B26(-13.861,-17.349) B27(-13.362,-13.349) B28(-13.362,-17.349) B29(-12.861,-13.349) B30(-12.861,-17.349) B31(-12.362,-13.349) B32(-12.362,-17.349) B33(-11.861,-13.349) B34(-11.861,-17.349) B35(-11.362,-13.349) B36(-11.362,-17.349) B37(-10.861,-13.349) B38(-10.861,-17.349) B39(-10.362,-13.349) B40(-10.362,-17.349) B41(-9.862,-13.349) B42(-9.862,-17.349) B43(-9.362,-13.349) B44(-9.362,-17.349) B45(-8.862,-13.349) B46(-8.862,-17.349) B47(-8.362,-13.349) B48(-8.362,-17.349) B49(-7.862,-13.349) B50(-7.862,-17.349) B51(-7.362,-13.349) B52(-7.362,-17.349) B53(-6.862,-13.349) B54(-6.862,-17.349) B55(-6.362,-13.349) B56(-6.362,-17.349) B57(-5.862,-13.349) B58(-5.862,-17.349) B59(-5.362,-13.349) B60(-5.362,-17.349) B61(-4.862,-13.349) B62(-4.862,-17.349) B63(-4.362,-13.349) B64(-4.362,-17.349) B65(-3.862,-13.349) B66(-3.862,-17.349) B67(-3.362,-13.349) B68(-3.362,-17.349) B69(-2.862,-13.349) B70(-2.862,-17.349) C1(2.847,17.349) C2(2.847,13.349) C3(3.347,17.349) C4(3.347,13.349) C5(3.847,17.349) C6(3.847,13.349) C7(4.347,17.349) C8(4.347,13.349) C9(4.847,17.349) C10(4.847,13.349) C11(5.347,17.349) C12(5.347,13.349) C13(5.847,17.349) C14(5.847,13.349) C15(6.347,17.349) C16(6.347,13.349) C17(6.847,17.349) C18(6.847,13.349) C19(7.347,17.349) C20(7.347,13.349) C21(7.847,17.349) C22(7.847,13.349) C23(8.347,17.349) C24(8.347,13.349) C25(8.847,17.349) C26(8.847,13.349) C27(9.347,17.349) C28(9.347,13.349) C29(9.847,17.349) C30(9.847,13.349) C31(10.347,17.349) C32(10.347,13.349) C33(10.847,17.349) C34(10.847,13.349) C35(11.347,17.349) C36(11.347,13.349) C37(11.847,17.349) C38(11.847,13.349) C39(12.347,17.349) C40(12.347,13.349) C41(12.847,17.349) C42(12.847,13.349) C43(13.347,17.349) C44(13.347,13.349) C45(13.847,17.349) C46(13.847,13.349) C47(14.347,17.349) C48(14.347,13.349) C49(14.847,17.349) C50(14.847,13.349) C51(15.347,17.349) C52(15.347,13.349) C53(15.847,17.349) C54(15.847,13.349) C55(16.347,17.349) C56(16.347,13.349) C57(16.847,17.349) C58(16.847,13.349) C59(17.347,17.349) C60(17.347,13.349) C61(17.847,17.349) C62(17.847,13.349) C63(18.347,17.349) C64(18.347,13.349) C65(18.847,17.349) C66(18.847,13.349) C67(19.347,17.349) C68(19.347,13.349) C69(19.847,17.349) C70(19.847,13.349) D1(-19.862,17.349) D2(-19.862,13.349) D3(-19.362,17.349) D4(-19.362,13.349) D5(-18.862,17.349) D6(-18.862,13.349) D7(-18.362,17.349) D8(-18.362,13.349) D9(-17.862,17.349) D10(-17.862,13.349) D11(-17.362,17.349) D12(-17.362,13.349) D13(-16.862,17.349) D14(-16.862,13.349) D15(-16.362,17.349) D16(-16.362,13.349) D17(-15.862,17.349) D18(-15.862,13.349) D19(-15.362,17.349) D20(-15.362,13.349) D21(-14.861,17.349) D22(-14.861,13.349) D23(-14.362,17.349) D24(-14.362,13.349) D25(-13.861,17.349) D26(-13.861,13.349) D27(-13.362,17.349) D28(-13.362,13.349) D29(-12.861,17.349) D30(-12.861,13.349) D31(-12.362,17.349) D32(-12.362,13.349) D33(-11.861,17.349) D34(-11.861,13.349) D35(-11.362,17.349) D36(-11.362,13.349) D37(-10.861,17.349) D38(-10.861,13.349) D39(-10.362,17.349) D40(-10.362,13.349) D41(-9.862,17.349) D42(-9.862,13.349) D43(-9.362,17.349) D44(-9.362,13.349) D45(-8.862,17.349) D46(-8.862,13.349) D47(-8.362,17.349) D48(-8.362,13.349) D49(-7.862,17.349) D50(-7.862,13.349) D51(-7.362,17.349) D52(-7.362,13.349) D53(-6.862,17.349) D54(-6.862,13.349) D55(-6.362,17.349) D56(-6.362,13.349) D57(-5.862,17.349) D58(-5.862,13.349) D59(-5.362,17.349) D60(-5.362,13.349) D61(-4.862,17.349) D62(-4.862,13.349) D63(-4.362,17.349) D64(-4.362,13.349) D65(-3.862,17.349) D66(-3.862,13.349) D67(-3.362,17.349) D68(-3.362,13.349) D69(-2.862,17.349) D70(-2.862,13.349)
  round 5.715 hole 3: H1(-25.452,16.452) H2(25.452,16.452) H3(25.452,-16.452) H4(-25.452,-16.452)
SOT23_5
  rect 0.6x1.2 smd: 1(-0.95,-1.45) 2(0,-1.45) 3(0.95,-1.45) 4(0.95,1.45) 5(-0.95,1.45)
SOT23_6
  rect 0.584x1.321 smd: 1(-0.95,-1.219) 2(0,-1.219) 3(0.95,-1.219) 4(0.95,1.219) 5(0,1.219) 6(-0.95,1.219)
SPM6530
  rect 2.032x3.556 smd: 1(-3.175,0) 2(3.175,0)
TF-CARD-A
  round 0.254 hole 0.914 unplated: (-4.953,-2.985) (3.048,-2.985)
  oval 0.66x1.524 smd: 1(2.251,8.026) 2(1.151,8.026) 3(0.051,8.026) 4(-1.049,8.026) 5(-2.149,8.026) 6(-3.249,8.026) 7(-4.349,8.026) 8(-5.45,8.026) 9(-6.55,8.026)
  rect 1.524x2.032 smd: 10(7.798,-2.584) 13(-7.798,-2.584)
  rect 1.524x1.118 smd: 11(6.858,6.985)
  rect 1.118x1.524 smd: 12(-7.798,6.985)
TP30
  round 0.762 smd: 1(0,0)
TSSOP14_TP
  rect 1.6x0.4 smd: 1(0,0) 2(0,-0.65) 3(0,-1.3) 4(0,-1.95) 5(0,-2.6) 6(0,-3.25) 7(0,-3.9) 8(5.6,-3.9) 9(5.6,-3.25) 10(5.6,-2.6) 11(5.6,-1.95) 12(5.6,-1.3) 13(5.6,-0.65) 14(5.6,0)
  rect 3.05x3.05 smd: 15(2.8,-1.95)
TSSOP16
  rect 0.3x1.3 smd: 1(-2.275,-3) 2(-1.625,-3) 3(-0.975,-3) 4(-0.325,-3) 5(0.325,-3) 6(0.975,-3) 7(1.625,-3) 8(2.275,-3) 9(2.275,3) 10(1.625,3) 11(0.975,3) 12(0.325,3) 13(-0.325,3) 14(-0.975,3) 15(-1.625,3) 16(-2.275,3)
TYPE-C_16P_90_SMD
  round 0.508 hole 0.66 unplated: (-2.89,2.475) (2.89,2.475)
  oval 0.991x2.083 hole 0.61x1.702: 1(-4.32,2.975) 2(4.32,2.975)
  oval 0.991x1.778 hole 0.61x1.397: 3(-4.32,-1.175) 4(4.32,-1.175)
  rect 0.279x1.143 smd: A1(-3.34,3.55) A4(-2.54,3.55) A5(-1.25,3.55) A6(-0.25,3.55) A7(0.25,3.55) A8(1.25,3.55) A9(2.54,3.55) A12(3.34,3.55) B1(3.06,3.55) B4(2.26,3.55) B5(1.75,3.55) B6(0.75,3.55) B7(-0.75,3.55) B8(-1.75,3.55) B9(-2.26,3.55) B12(-3.06,3.55)
unnamed
  round 2.9 hole 2.9 unplated: (0,0)
unnamed#2
  round 3.2 hole 3.2 unplated: (-30.86,90.6) (-30.86,14) (30.86,90.6) (30.86,14)
XH254-3
  rect 1.626x1.626 hole 1.118: 1(0,-2.54)
  round 1.626 hole 1.118: 2(0,0) 3(0,2.54)
XH254_2_0
  rect 1.626x1.626 hole 1.118: 1(-1.25,0)
  round 1.626 hole 1.118: 2(1.25,0)

## Nets
AA11/PF0/SDC0_D1/JTAG_MS1/3V3: CON1.A47(AA11/PF0/SDC0_D1/JTAG_MS1/3V3) J7.8(DATA1) R26.2
AA13/PF3/SDC0_CMD/JTAG_DO1/3V3: CON1.A55(AA13/PF3/SDC0_CMD/JTAG_DO1/3V3) J7.3(CMD) R29.2
AGND_AUDIO: CON1.A19(AGND_AUDIO#A19) CON1.A24(AGND_AUDIO#A24)
AGND_TVIN: CON1.A18(AGND_TVIN)
AVDD_3V3_ETH1: C59.1 C60.1 D4.1(AVDD33#1) D4.12(AVDD33#12) FB8.2
AVDD_3V3_ETH2: C73.1 C74.1 C75.2 D6.7(AVDD33) FB10.2
AVDDL_REG_ETH2: C81.1 C82.2 D6.2(AVDDL_REG)
DVDDL_REG_ETH2: C79.1 C80.2 D6.29(DVDDL_REG)
F22/PB22/UART0_TX/3V3: CON1.D48(F22/PB22/UART0_TX/3V3) D3.21(TXD_SCI) R20.2
F23/PB23/UART0_RX/IR1_RX/3V3: CON1.D50(F23/PB23/UART0_RX/IR1_RX/3V3) D3.20(RXD_SCI) R21.2
GND: C1.1 C2.2 C3.1 C4.2 C5.2 C6.1 C9.2 C10.2 C11.1 C12.1 C13.2 C14.2 C15.1 C17.2 C18.2 C20.1 C21.1 C22.2 C23.2 C24.2 C25.2 C26.2 C27.1 C28.1 C29.1 C30.1 C33.2 C34.2 C35.2 C36.2 C37.2 C38.2 C39.2 C40.2 C41.2 C46.2 C47.2 C48.2 C49.2 C50.2 C51.1 C52.1 C53.1 C54.2 C55.2 C56.2 C57.2 C58.2 C59.2 C60.2 C61.2 C62.2 C63.2 C64.2 C65.2 C66.2 C67.2 C68.2 C69.2 C70.2 C71.1 C72.1 C73.2 C74.2 C75.1 C76.2 C77.2 C78.1 C79.2 C80.1 C81.2 C82.1 C83.2 C84.2 C85.2 C86.2 CON1.A25(GND#A25) CON1.A31(GND#A31) CON1.A34(GND#A34) CON1.A37(GND#A37) CON1.A43(GND#A43) CON1.A44(GND#A44) CON1.A54(GND#A54) CON1.A56(GND#A56) CON1.A57(GND#A57) CON1.A58(GND#A58) CON1.A59(GND#A59) CON1.A60(GND#A60) CON1.B6(GND#B6) CON1.B12(GND#B12) CON1.B18(GND#B18) CON1.B24(GND#B24) CON1.B30(GND#B30) CON1.B31(GND#B31) CON1.B33(GND#B33) CON1.B36(GND#B36) CON1.B39(GND#B39) CON1.B42(GND#B42) CON1.B45(GND#B45) CON1.B48(GND#B48) CON1.B51(GND#B51) CON1.B54(GND#B54) CON1.B57(GND#B57) CON1.B60(GND#B60) CON1.B63(GND#B63) CON1.C5(GND#C5) CON1.C14(GND#C14) CON1.C20(GND#C20) CON1.C26(GND#C26) CON1.C31(GND#C31) CON1.C32(GND#C32) CON1.C38(GND#C38) CON1.C48(GND#C48) CON1.C54(GND#C54) CON1.C57(GND#C57) CON1.C60(GND#C60) CON1.C66(GND#C66) CON1.C67(GND#C67) CON1.D28(GND#D28) CON1.D31(GND#D31) CON1.D39(GND#D39) CON1.D46(GND#D46) CON1.D53(GND#D53) CON1.D67(GND#D67) CON1.H1 CON1.H2 CON1.H3 CON1.H4 D1.2(GND) D2.15(GND) D3.2(GND#2) D3.25(GND#25) D4.49(GND) D5.3(GND) D6.33(GND) D7.3(GND) FB2.1 J1.2 J2.3 J3.3 J4.A1(GND#A1) J4.A12(GND#A12) J4.B1(GND#B1) J4.B12(GND#B12) J5.1(GND1) J5.4(GND2) J5.7(GND3) J6.2(GND1) J6.3(GND2) J7.6(VSS) J7.10(GND1) J7.11(GND2) J7.12(GND3) J7.13(GND4) J8.12 J8.13 J9.10(C_GRN) J9.11(C_YLW) R4.1 R5.1 R6.1 R9.1 R11.1 R13.1 R15.1 R16.1 R22.2 R23.2 R48.1 R54.1 R55.1 R56.1 R63.1 R64.1 R65.1 R66.1 R67.1 R68.1 R69.2 R74.2 R80.1 R81.1 R85.2 R86.2 R87.2 R88.2 SW1.2 SW2.1 U1.7(GND) U1.8(HEVNN) U1.15(EXPOSED) U2.5(GND) U2.8(PGND1) U2.9(PGND2) U2.15(EP) U3.5(GND) U3.8(PGND1) U3.9(PGND2) U3.15(EP) V1.2(ANODE) V2.3(GND#3) V2.8(GND#8) V3.3(GND#3) V3.8(GND#8) V4.3(GND#3) V4.8(GND#8) V5.3(GND#3) V5.8(GND#8) V13.2(ANODE) V14.2(ANODE) V15.2(ANODE) X1.3 X1.4 X1.35 X1.36 X1.67 X1.68
GND_EARTH: C86.1 FB2.2 J4.1(EP1) J4.2(EP2) J4.3(EP3) J4.4(EP4) J8.10 J8.17(SHELL_GND#17) J8.18(SHELL_GND#18) J9.7(NC) J9.8(CHS GND#8) J9.15(CHS GND#15) J9.16(CHS GND#16) R88.1 X1.6 X1.7 X1.38 X1.39 X1.70 X1.71
K21/PB6/I2S_BCLK/AC97_BCLK/3V3: CON1.D40(K21/PB6/I2S_BCLK/AC97_BCLK/3V3) R25.2 R32.1
K23/PB2/ETH2_RESETN/4G_PEN/3V3: CON1.D49(K23/PB2/PWM0/3V3) R149.1
L7/FEL/PU/3V3: CON1.A46(L7/FEL/3V3) R16.2
M20/PA5/ETXD2/SPI3_CS0/GTXD2/3V: CON1.D64(M20/PA5/ETXD2/SPI3_CS0/GTXD2/3V) D4.17(TXD2)
M21/PA4/ETXD3/SPI1_CS1/GTXD3/3V: CON1.D68(M21/PA4/ETXD3/SPI1_CS1/GTXD3/3V) D4.16(TXD3)
M24/PA6/ETXD1/SPI3_CLK/GTXD1/3V: CON1.D66(M24/PA6/ETXD1/SPI3_CLK/GTXD1/3V) D4.18(TXD1)
N20/PA11/EMDC/UART1_RX/GMDC/3V3: CON1.D37(N20/PA11/EMDC/UART1_RX/GMDC/3V3) D4.14(MDC)
R20/PA17/ETH1_RESETN/3V3: CON1.B27(R20/PA17/ETXERR/CAN_RX/UART1_RI) R126.1
RESETN_YT8512H/3V3: C84.1 D6.21(RESET_N) D7.4(Y) R71.2
RESETN_YT8521SH/3V3: C58.1 D4.13(RESET_N) D5.4(Y) R50.1
SYS_RESETN/3V3: CON1.A50(R24/AP-RESETN/3V) D1.1(RESETN) R17.1 R49.1 R72.1
VDD_3V0_RTC: CON1.C69(VDD_3V0_RTC)
VDD_3V3_DRG: C63.1 C64.1 FB5.2 R34.2
VDD_3V3_ETH1: C54.1 C65.1 C66.1 D5.5(VCC) FB3.2 FB5.1 FB6.1 FB8.1 R33.2 R35.1 R36.1 R47.2 R50.2 R51.2 R52.2 R53.2 R57.2 R58.2 R59.2 R60.2 R61.2 R62.2
VDD_3V3_ETH2: C76.1 C77.1 C78.2 C83.1 D6.14(DVDD33) D7.5(VCC) FB9.2 FB10.1 R70.2 R71.1 R73.2(P2) R75.1 R77.2 R78.2 R82.2 R83.2 R84.2
VDD_3V3_MAIN: C16.2 C17.1 C18.1 C27.2 C29.2 C30.2 C46.1 C47.1 CON1.D69(VDD_3V3_MAIN) D1.5(SENSE) D1.6(VDD) D2.16(VCC) FB3.1 FB9.1 J7.4(VCC) L2.2 R12.2 R17.2 R25.1 R26.1 R27.1 R28.1 R29.1 R30.1 R31.1 U3.1(VO)
VDD_3V3_REG: C61.1 C62.1 D4.30(DVDD33) D4.31(VDD33_LX) FB6.2
VDD_5V_SOM: C7.2 C9.1 C10.1 C22.1 C23.1 C24.1 C25.1 C26.1 C48.1 C49.1 C50.1 CON1.A63(VDD_5V_SOM#A63) CON1.A64(VDD_5V_SOM#A64) CON1.A65(VDD_5V_SOM#A65) CON1.A66(VDD_5V_SOM#A66) CON1.A67(VDD_5V_SOM#A67) CON1.A68(VDD_5V_SOM#A68) CON1.A69(VDD_5V_SOM#A69) CON1.A70(VDD_5V_SOM#A70) J6.1(+5V) L1.2 R7.2 U2.1(VO)
VDDL_1V2_A: C67.1 C68.1 D4.4(AVDDL#4) D4.9(AVDDL#9) D4.47(AVDDL#47) FB7.2
VDDL_1V2_ETH: C55.1 C56.1 FB4.1 FB7.1 L3.2
VDDL_1V2_L: C69.1 C70.1 D4.22(DVDDL) FB4.2
VIN_12V: C3.2 J1.1 R3.1 V1.1(CATHODE) V6.2(ANODE) X1.1 X1.2 X1.33 X1.34 X1.65 X1.66
VIN_12V_O: C1.2 C2.1 C4.1 C5.1 C6.2 C13.1 C14.1 C15.2 R10.2 R14.2 RJ1.1 U1.12(OUT1) U1.13(OUT2) U1.14(OUT3) U2.13(VIN1) U2.14(VIN2) U3.13(VIN1) U3.14(VIN2)
W11/PF2/SDC0_CLK/UART0_TX/3V3: CON1.A49(W11/PF2/SDC0_CLK/UART0_TX/3V3) J7.5(CLK) R28.2
W13/PF5/SDC0_D2/JTAG_CK1/3V3: CON1.A51(W13/PF5/SDC0_D2/JTAG_CK1/3V3) J7.1(DATA2) R31.2
Y11/PF1/SDC0_D0/JTAG_DI1/3V3: CON1.A45(Y11/PF1/SDC0_D0/JTAG_DI1/3V3) J7.7(DATA0) R27.2
Y13/PF4/SDC0_D3/UART0_RX/3V3: CON1.A53(Y13/PF4/SDC0_D3/UART0_RX/3V3) J7.2(DATA3) R30.2
A18/PH26/LCD1_HSYNC/ECOL/KP_OUT: CON1.D1(A18/PH26/LCD1_HSYNC/ECOL/KP_OUT) D6.27(COL)
A21/PH15/LCD1_D15/ETXD2/KP_IN5/: CON1.D20(A21/PH15/LCD1_D15/ETXD2/KP_IN5/) D6.18(TXD2)
A22/PH10/LCD1_D10/ERXD1/KP_IN2/: CON1.D9(A22/PH10/LCD1_D10/ERXD1/KP_IN2/) D6.10(RXD1) R84.1 R87.1
A23/PH9/LCD1_D9/ERXD2/KP_IN1/MS: CON1.D11(A23/PH9/LCD1_D9/ERXD2/KP_IN1/MS) D6.11(RXD2/INT_N)
AA8/SATA_ESRXP: C45.1 CON1.C30(AA8/SATA_ESRXP)
AA9/SATA_ESTXP: C42.1 CON1.C24(AA9/SATA_ESTXP)
AB8/SATA_ESRXM: C44.1 CON1.C28(AB8/SATA_ESRXM)
AB9/SATA_ESTXM: C43.1 CON1.C22(AB9/SATA_ESTXM)
B18/PH24/LCD1_CLK/ETXCK/KP_OUT4: CON1.D3(B18/PH24/LCD1_CLK/ETXCK/KP_OUT4) D6.15(TXC)
B21/PH14/LCD1_D14/ETXD3/KP_IN4/: CON1.D22(B21/PH14/LCD1_D14/ETXD3/KP_IN4/) D6.19(TXD3)
B23/PH8/LCD1_D8/ERXD3/KP_IN0/MS: CON1.D13(B23/PH8/LCD1_D8/ERXD3/KP_IN0/MS) D6.12(RXD3/CLK_CTL) R83.1 R86.1
C18/PH18/LCD1_D18/ERXCK/KP_OUT0: CON1.D14(C18/PH18/LCD1_D18/ERXCK/KP_OUT0) D6.13(RXC)
C19/PH23/LCD1_D23/ETXEN/KP_OUT3: CON1.D4(C19/PH23/LCD1_D23/ETXEN/KP_OUT3) D6.20(TX_EN)
C21/PH11/LCD1_D11/ERXD0/KP_IN3/: CON1.D7(C21/PH11/LCD1_D11/ERXD0/KP_IN3/) D6.9(RXD0)
D18/PH17/LCD1_D17/ETXD0/KP_IN7/: CON1.D16(D18/PH17/LCD1_D17/ETXD0/KP_IN7/) D6.16(TXD0)
D19/PH21/LCD1_D21/EMDC/CAN_RX/E: CON1.D8(D19/PH21/LCD1_D21/EMDC/CAN_RX/E) D6.22(MDC)
D21/PH16/LCD1_D16/ETXD1/KP_IN6/: CON1.D18(D21/PH16/LCD1_D16/ETXD1/KP_IN6/) D6.17(TXD1)
D23/PH0/LCD1_D0/UART3_TX/EINT0/: CON1.D29(D23/PH0/LCD1_D0/UART3_TX/EINT0/) D3.13(TXD_ECI) R18.2
DBG232_UART0_RXD: D2.8(R2IN) J3.2
DBG232_UART0_TXD: D2.7(T2OUT) J3.1
E18/PH25/LCD1_DE/ECRS/KP_OUT5/S: CON1.D2(E18/PH25/LCD1_DE/ECRS/KP_OUT5/S) D6.26(CRS/CRS_DV) R74.1
E19/PH19/LCD1_D19/ERXERR/KP_OUT: CON1.D12(E19/PH19/LCD1_D19/ERXERR/KP_OUT) D6.28(RXER)
E23/PH1/LCD1_D1/UART3_RX/EINT1/: CON1.D27(E23/PH1/LCD1_D1/UART3_RX/EINT1/) D3.12(RXD_ECI) R19.2
ETH_RDN: D6.6(TRXN1) J9.6(RX-) V5.2(IN2) V5.9(NC3)
ETH_RDP: D6.5(TRXP1) J9.3(RX+) V5.1(IN1) V5.10(NC4)
ETH_TDN: D6.4(TRXN0) J9.2(TX-) V4.2(IN2) V4.9(NC3)
ETH_TDP: D6.3(TRXP0) J9.1(TX+) V4.1(IN1) V4.10(NC4)
F18/PH20/LCD1_D20/ERXDV/CAN_TX/: CON1.D10(F18/PH20/LCD1_D20/ERXDV/CAN_TX/) D6.8(RX_DV) R82.1 R85.1
G17/PH22/LCD1_D22/EMDIO/KP_OUT2: CON1.D6(G17/PH22/LCD1_D22/EMDIO/KP_OUT2) D6.23(MDIO) R75.2
L23/PA0/ERXD3/SPI1_CS0/UART2_RT: CON1.D59(L23/PA0/ERXD3/SPI1_CS0/UART2_RT) D4.23(RXD3/CFG_MODE2) R59.1 R65.2
LED0/PHYAD0: C57.1 D4.35(LED0/PHYAD0) R53.1 R56.2
LED0_AD0: D6.24(LED0_AD0) R76.1 R77.1 R80.2
LED1/CFG_LDO0: D4.36(LED1/CFG_LDO0) R46.1 R60.1 R66.2
LED1_AD1: D6.25(LED1/PHYAD1) R78.1 R79.1 R81.2
LED2/CFG_LDO1: D4.37(LED2/CFG_LDO1) R45.1 R61.1 R67.2
M19/PA1/ERXD2/SPI1_CLK/UART2_CT: CON1.D57(M19/PA1/ERXD2/SPI1_CLK/UART2_CT) D4.24(RXD2/CFG_MODE1) R58.1 R64.2
M22/PA3/ERXD0/SPI1_MISO/UART2_R: CON1.D63(M22/PA3/ERXD0/SPI1_MISO/UART2_R) D4.26(RXD0/RXDLY) R62.1 R68.2
M23/PA2/ERXD1/SPI1_MOSI/UART2_T: CON1.D61(M23/PA2/ERXD1/SPI1_MOSI/UART2_T) D4.25(RXD1/CFG_MODE0) R57.1 R63.2
MDI0_N_D: J8.3 R38.2 V2.2(IN2) V2.9(NC3)
MDI0_P_D: J8.2 R37.2 V2.1(IN1) V2.10(NC4)
MDI1_N_D: J8.7 R39.2 V2.5(IN4) V2.6(NC1)
MDI1_P_D: J8.4 R41.2 V2.4(IN3) V2.7(NC2)
MDI2_N_D: J8.6 R40.2 V3.2(IN2) V3.9(NC3)
MDI2_P_D: J8.5 R42.2 V3.1(IN1) V3.10(NC4)
MDI3_N_D: J8.9 R44.2 V3.5(IN4) V3.6(NC1)
MDI3_P_D: J8.8 R43.2 V3.4(IN3) V3.7(NC2)
N19/PA12/EMDIO/UART6_TX/UART1_R: CON1.B29(N19/PA12/EMDIO/UART6_TX/UART1_R) D4.15(MDIO) R35.2
N21/PA10/ERXDV/UART1_TX/GRXCTL/: CON1.D55(N21/PA10/ERXDV/UART1_TX/GRXCTL/) D4.27(RX_CTL/PHYAD2) R51.1 R54.2
N23/PA8/ERXCK/SPI3_MISO/GRXCK/3: CON1.D65(N23/PA8/ERXCK/SPI3_MISO/GRXCK/3) D4.28(RX_CLK/PHYAD1) R52.1 R55.2
N24/PA7/ETXD0/SPI3_MOSI/GTXD0/3: CON1.D70(N24/PA7/ETXD0/SPI3_MOSI/GTXD0/3) D4.19(TXD0)
P23/PA13/ETXEN/UART6_RX/UART1_C: CON1.D62(P23/PA13/ETXEN/UART6_RX/UART1_C) D4.20(TX_CTL)
PMIC_PWRON: CON1.A52(PMIC_PWRON) SW1.1
R22/PA15/ECRS/UART7_RX/UART1_DS: CON1.D60(R22/PA15/ECRS/UART7_RX/UART1_DS) D4.21(TX_CLK)
RS232_UART3_RXD: D2.13(R1IN) J2.2
RS232_UART3_TXD: D2.14(T1OUT) J2.1
RXCT: C85.1 J9.4(TXCT) J9.5(RXCT) R73.1(P1) V5.4(IN3) V5.5(IN4) V5.6(NC1) V5.7(NC2)
USB_D+: D3.3(D+) J4.A6(DP1) J4.B6(DP2) V15.1(CATHODE)
USB_D-: D3.4(D-) J4.A7(DN1) J4.B7(DN2) V14.1(CATHODE)
USB_VBUS: C38.1 C39.1 C40.1 D3.7(REGIN) D3.8(VBUS) J4.A4(VBUS#A4) J4.A9(VBUS#A9) J4.B4(VBUS#B4) J4.B9(VBUS#B9) V13.1(CATHODE)
USB_VBUS_3V3: C36.1 D3.5(VIO) FB1.2 R24.1
N15533766: C51.2 J8.1 R36.2
N15533884: D4.2(TRXP0) R37.1
N15533886: D4.11(TRXN3) R44.1
N15533888: D4.7(TRXP2) R42.1
N15533890: D4.6(TRXN1) R39.1
N15533892: D4.5(TRXP1) R41.1
N15533894: D4.3(TRXN0) R38.1
N15533896: D4.8(TRXN2) R40.1
N15533898: D4.10(TRXP3) R43.1
N15533908: C53.2 D4.45(XTAL_I) Y1.2
N15533910: C52.2 D4.46(XTAL_O) Y1.1
N15533944: D4.44(CLKOUT) TP1.1(TP)
N15534206: D4.34(INT_N/PME_N) R33.1
N15534212: D4.29(DVDD_RGMII) R34.1
N15534402: J8.11 R45.2
N15537719: C71.2 D6.32(XTAL_OUT) Y2.1
N15537721: C72.2 D6.31(XTAL_IN) Y2.2
N15537723: D6.1(RBIAS) R69.1
N15538041: J9.9(A_GRN) R79.2
N16839189: D1.3(MRN) SW2.2
N16840583: C28.2 D1.4(CT)
N16901725: J9.12(A_YLW) R76.2
N17001968: J8.14 R46.2
N17010134: C32.2 D2.5(C2-)
N17010136: C33.1 D2.2(V+)
N17010140: C31.2 D2.3(C1-)
N17010142: C32.1 D2.4(C2+)
N17010158: C31.1 D2.1(C1+)
N17010259: D2.11(T1IN) R18.1
N17010261: D2.12(R1OUT) R19.1
N17010263: D2.9(R2OUT) R21.1
N17010265: D2.10(T2IN) R20.1
N17010666: C42.2 J5.2(A+)
N17010668: C45.2 J5.6(B+)
N17010683: C44.2 J5.5(B-)
N17010685: C43.2 J5.3(A-)
N17011500: J7.9(C/D) R32.2
N17038577: C41.1 D3.9(R\S\T\) R24.2
N17038610: C35.1 D3.6(VDD) FB1.1
N17038736: C37.1 D3.16(NC/DCD_ECI/VPP)
N17039047: J4.B5(CC2) R23.1
N17039105: J4.A5(CC1) R22.1
N17045621: R1.1 R5.2 U1.5(OLVO)
N17045623: R1.2 R2.2 RJ1.2 U1.1(IN1) U1.2(IN2) U1.3(IN3) V6.1(CATHODE)
N17045635: R2.1 R6.2 U1.4(UVLO)
N17045685: R3.2 U1.9(RIEN) U1.10(EN)
N17045709: R4.2 U1.6(SETI)
N17045897: R14.1 R15.2 U3.7(EN)
N17045977: C16.1 R12.1 R13.2 U3.2(VFB)
N17045999: C21.2 U3.4(SS)
N17046019: C19.1 L2.1 U3.10(SW1) U3.11(SW2)
N17046027: C19.2 U3.12(VBST)
N17046043: C20.2 R91.1 U3.3(VREG5)
N17046174: R10.1 R11.2 U2.7(EN)
N17046258: C7.1 R8.1 R9.2 U2.2(VFB)
N17046288: C12.2 U2.4(SS)
N17046302: C8.1 L1.1 U2.10(SW1) U2.11(SW2)
N17046320: C8.2 U2.12(VBST)
N17046328: C11.2 R90.1 U2.3(VREG5)
N17050317: D5.1(A) R47.1 R126.2
N17050591: D5.2(B) R49.2
N17053182: D7.1(A) R70.1 R149.2
N17053197: D7.2(B) R72.2
N18912485: D4.48(RBIAS) R48.2
N18912747: D4.32(LX) L3.1
N170101920: C34.1 D2.6(V-)
N170462161: R7.1 R8.2
N1704612610: R91.2 U3.6(PG)
N1704641110: R90.2 U2.6(PG)

Pads without a net: CON1 A1 A2 A3 A4 A5 A6 A7 A8 A9 A10 A11 A12 A13 A14 A15 A16 A17 A20 A21 A22 A23 A26 A27 A28 A29 A30 A32 A33 A35 A36 A38 A39 A40 A41 A42 A48 A61 A62 B1 B2 B3 B4 B5 B7 B8 B9 B10 B11 B13 B14 B15 B16 B17 B19 B20 B21 B22 B23 B25 B26 B28 B32 B34 B35 B37 B38 B40 B41 B43 B44 B46 B47 B49 B50 B52 B53 B55 B56 B58 B59 B61 B62 B64 B65 B66 B67 B68 B69 B70 C1 C2 C3 C4 C6 C7 C8 C9 C10 C11 C12 C13 C15 C16 C17 C18 C19 C21 C23 C25 C27 C29 C33 C34 C35 C36 C37 C39 C40 C41 C42 C43 C44 C45 C46 C47 C49 C50 C51 C52 C53 C55 C56 C58 C59 C61 C62 C63 C64 C65 C68 C70 D5 D15 D17 D19 D21 D23 D24 D25 D26 D30 D32 D33 D34 D35 D36 D38 D41 D42 D43 D44 D45 D47 D51 D52 D54 D56 D58; D3 1 10 11 14 15 17 18 19 22 23 24; D4 33 38 39 40 41 42 43; D6 30; J4 A8 B8; J6 4; U1 11; V4 4 5 6 7; X1 5 8 9 10 11 12 13 14 15 16 17 18 19 20 21 22 23 24 25 26 27 28 29 30 31 32 37 40 41 42 43 44 45 46 47 48 49 50 51 52 53 54 55 56 57 58 59 60 61 62 63 64 69 72 73 74 75 76 77 78 79 80 81 82 83 84 85 86 87 88 89 90 91 92 93 94 95 96; X2 1 2 3 4 5 6 7 8 9 10 11 12 13 14 15 16 17 18 19 20 21 22 23 24 25 26 27 28 29 30 31 32 33 34 35 36 37 38 39 40 41 42 43 44 45 46 47 48 49 50 51 52 53 54 55 56 57 58 59 60 61 62 63 64 65 66 67 68 69 70 71 72 73 74 75 76 77 78 79 80 81 82 83 84 85 86 87 88 89 90 91 92 93 94 95 96

## Via types
v1: diameter 0.457, hole 0.254, TOP to BOTTOM, 782 vias
v2: diameter 0.61, hole 0.305, TOP to BOTTOM, 106 vias
v3: diameter 0.559, hole 0.305, TOP to BOTTOM, 22 vias

## Routing (per net, layer and track width the routed paths; a pad name or vN(x,y) marks a point on that pad's centre or on a via; arc(x,y) is an arc through that point)
AA11/PF0/SDC0_D1/JTAG_MS1/3V3: length 56.7
  TOP w0.229: J7.8 195.75,80.33 v1(195.37,79.95) R26.2 ; CON1.A47 v1(162.26,65.01)
  L4-S w0.33: v1(162.26,65.01) 161.83,65.01 161.31,64.49 161.31,62.44 161.83,61.92 173.41,61.92 190.71,79.22 194.64,79.22 v1(195.37,79.95)
AA13/PF3/SDC0_CMD/JTAG_DO1/3V3: length 56.7
  TOP w0.229: CON1.A55 164.26,63.45 165.26,64.45 v1(165.26,66.02) ; J7.3 196.85,85.83 v1(195.37,87.32) R29.2
  L4-S w0.33: v1(195.37,87.32) 194.63,86.57 194.63,83.6 194.27,83.25 193.32,83.25 193.12,83.45 193.12,84.89 192.84,85.17 188.67,85.17 170.65,67.16 166.39,67.16 v1(165.26,66.02)
AGND_AUDIO: length 4.4
  TOP w0.305: CON1.A19 155.26,56.13 156.26,55.13 CON1.A24
AVDD_3V3_ETH1: length 5.1
  TOP w0.254: D4.1 165.7,115.35 166.2,115.84 v1(166.2,115.86) ; v1(161.3,115.86) D4.12
  TOP w0.381: FB8.2 v2(156.62,118.16)
  BOTTOM w0.381: v1(161.3,115.86) 161.18,115.74 C59.1 ; C60.1 166.2,115.47 v1(166.2,115.86)
  vias: v2(156.62,117.01)
AVDD_3V3_ETH2: length 4.3
  TOP w0.381: D6.7 131.06,116.57 C73.1
AVDDL_REG_ETH2: length 15.4
  TOP w0.229: C81.1 C82.2 136.9,123.22 133.56,119.87 D6.2
DVDDL_REG_ETH2: length 7.5
  TOP w0.229: D6.29 137.47,111.97 139.02,110.41 C79.1 C80.2
F22/PB22/UART0_TX/3V3: length 88.8
  TOP w0.229: R20.2 v1(114.78,33.12) ; CON1.D48 139.55,82.1 v1(139.05,81.6) ; D3.21 v1(113.92,18.48)
  L4-S w0.33: v1(113.92,18.48) 112.9,19.51 112.9,33.53 113.23,33.86 114.03,33.86 v1(114.78,33.12) 115.63,32.26 126.01,32.26 137.17,43.42 137.17,57.83 136.82,58.18 136.82,72.02 139.05,74.25 v1(139.05,81.6)
F23/PB23/UART0_RX/IR1_RX/3V3: length 89
  TOP w0.229: R21.2 v1(113.51,33.12) 113.51,19.37 113.9,18.98 D3.20 ; CON1.D50 v1(140.05,82.87)
  L4-S w0.33: v1(113.51,33.12) 115.3,31.32 126.83,31.32 138.98,43.48 138.98,57.36 138.2,58.14 138.2,71.42 140.05,73.27 v1(140.05,82.87)
GND: length 195.5
  TOP w0.254: D3.2 v1(115.93,15.45)
  TOP w0.305: CON1.C38 v1(159.76,82.87) ; CON1.A43 v1(161.26,56.09) ; CON1.B18 v1(132.05,52.09) ; CON1.B39 v1(137.55,59.04) ; CON1.B42 v1(138.05,52.09) ; CON1.D28 v1(134.55,82.87) ; CON1.D53 v1(141.05,89.66) ; v1(160.89,55.09) 161.26,54.72 CON1.A44 ; CON1.B31 v1(135.55,56.09) ; CON1.C20 v1(155.26,85.66) ; CON1.C60 v1(165.26,82.87) ; CON1.C14 v1(153.76,82.87) ; CON1.D67 v1(144.55,86.87) ; CON1.B6 v1(129.05,52.09) ; CON1.B24 v1(133.55,52.09) ; CON1.C31 v1(158.26,89.66) ; CON1.B48 v1(139.55,52.09) ; CON1.B33 v1(136.05,59.04) ; CON1.C57 v1(164.76,89.66) ; CON1.B51 v1(140.55,59.04) ; D2.15 v1(118.31,38.79) ; CON1.D46 v1(139.05,82.87) ; CON1.B57 v1(142.05,59.04) ; CON1.C32 v1(158.26,85.66) ; CON1.B63 v1(143.55,59.04) ; CON1.D31 v1(135.55,89.66) ; CON1.A25 v1(156.76,56.09) ; CON1.C26 v1(156.76,85.66) ; CON1.C67 v1(167.26,86.87) ; CON1.B54 v1(141.05,52.09) ; CON1.B60 v1(142.55,52.09) ; CON1.D39 v1(137.55,86.87) ; CON1.A34 v1(158.76,55.04) ; CON1.B36 v1(136.55,52.09) ; CON1.B45 v1(139.05,59.04) ; CON1.C5 v1(151.76,89.66) ; CON1.C54 v1(163.76,82.87) ; CON1.B12 v1(130.55,52.09) ; CON1.A37 v1(159.76,56.09) ; CON1.B30 v1(135.05,52.09) ; CON1.A31 v1(158.26,56.09) ; CON1.C48 v1(162.26,82.87) ; CON1.C66 v1(166.76,82.87)
  TOP w0.381: C33.2 v1(121.03,43.74) ; v1(134.05,126.27) V4.8 V4.3 v1(134.05,128.57) ; U1.7 v1(193.24,38.81) ; R6.1 v1(195.28,37.81) ; v1(204.03,69.52) 203.94,69.61 U3.9 ; C34.2 v1(112.36,43.74) ; D1.2 v1(145.14,40.74) ; v1(122.12,21.45) 122.13,21.45 C40.2 ; v1(161.75,126.26) V3.8 V3.3 v1(161.75,128.58) ; U3.8 v1(201.26,70.26) ; v1(130.56,128.57) V5.3 V5.8 v1(130.56,126.27) ; v1(165.24,128.58) V2.3 V2.8 v1(165.24,126.26) ; R4.1 v1(197.44,41.77) ; C54.2 v1(148.02,118.14) ; v1(206.45,69.52) 206.45,69.35 206.83,68.96 U3.5 ; U2.5 206.54,52.69 206.15,53.07 v1(206.15,53.24) ; U2.8 v1(200.97,53.99) ; C72.1 v1(141.66,111.99) ; C51.1 v1(168.1,125.96) ; R5.1 v1(194.51,40.17) ; U2.9 203.65,53.34 v1(203.74,53.24) ; V1.2 v2(215.18,35.56) ; D7.3 v1(130.74,103.09) ; C58.2 v1(149.49,118.14)
  TOP w0.457: v1(210.77,93.58) J7.10 v1(207.97,93.58) ; C85.2 v1(128.21,128.88) ; R16.1 v1(160.36,47.04) ; C29.1 v1(118.59,33.12) ; R15.1 v1(213.56,72) ; v1(210.77,77.98) J7.13 v1(207.97,77.98) ; C41.2 v1(121.3,24.43) ; R69.2 v1(139.85,128.88) ; C37.2 v1(116.43,24.43) ; C20.1 v1(213.56,67.58) ; R56.1 v1(172.58,104.77) ; R22.2 v1(113.93,12.84) ; v1(200.94,92.64) J7.11 v1(198.66,92.64) ; C84.2 v1(122.41,102.14) ; C61.2 v1(161.01,102.59) ; C86.2 v1(200.24,25.27) ; C62.2 v1(161.77,104.8) ; V15.2 v1(115.81,12.95) ; R13.1 v1(213.56,66.1) ; C82.1 v1(136.9,128.88) ; C21.1 v1(213.56,70.52) ; C47.2 v1(192.45,85.84) ; R23.2 v1(119.43,12.89) ; C46.2 v1(192.45,84.37) ; J7.6 v1(197.61,82.53) ; C78.1 v1(122.41,109.15) ; C36.2 v1(122.12,13.66) ; C81.2 v1(138.38,128.88) ; C79.2 v1(142.21,110.41) ; R80.1 v1(136.4,99.9) ; C39.2 v1(120.54,20.8) ; C66.2 v1(154.89,118.47) ; C56.2 v1(163.74,97.37) ; R88.2 v1(203.55,25.27) ; R85.2 v1(125.33,115.45) ; R54.1 v1(157.04,104.77) ; C80.1 v1(142.21,108.84) ; C64.2 v1(162.35,99.52) ; R74.2 v1(142.21,107.26) ; C83.2 v1(122.41,100.67) ; C63.2 v1(162.35,101) ; C12.1 v1(213.27,54.98) ; C57.2 v1(171,98.8) ; R9.1 v1(213.27,50.57) ; C76.2 123.11,107.64 122.46,107.64 v1(122.41,107.58) ; D5.3 v1(150.44,111.76) ; R86.2 v1(125.33,112.3) ; C77.2 v1(122.41,110.73) ; C30.1 v1(119.86,33.12) ; v1(198.66,77.98) J7.12 v1(200.94,77.98) ; v1(125.68,21.62) C38.2 v1(124.54,22.64) ; R81.1 v1(142.21,105.69) ; C69.2 v1(157.07,112.31) ; R11.1 v1(213.27,56.46) ; R48.1 v1(170.13,121.39) ; C70.2 v1(154.86,111.54) ; R67.1 v1(175.73,104.77) ; R66.1 v1(174.15,104.77) ; R63.1 v1(153.89,104.77) ; C55.2 v1(170.43,97.37) ; C11.1 v1(213.27,52.04) ; R55.1 v1(158.62,104.77) ; R87.2 v1(125.33,113.88) ; R68.1 v1(155.47,104.77) ; R64.1 v1(157.8,107) ; V14.2 v1(117.56,12.95) ; R65.1 v1(157.8,108.57) ; V13.2 v1(122.12,12.14) ; FB2.1 v1(201.89,25.49) ; C35.2 v1(120.54,17.93) ; C65.2 v1(153.89,95.91)
  TOP w1.27: J6.2 209.25,131.56 ; J6.2 206.94,131.56 ; J6.2 209.25,133.86 ; J6.2 206.94,133.86 ; J6.3 209.25,138.94 ; J6.3 206.94,138.94 ; J6.3 206.94,136.64 ; J6.3 209.25,136.64
  L3_VCC w0.381: v1(22.52,149.3) v1(19.98,149.3)
  L4-S w1.27: 206.98,138.9 J6.3 ; J6.3 209.21,136.68 ; J6.3 206.98,136.68 ; J6.3 209.21,138.9 ; 206.98,133.82 J6.2 ; J6.2 209.21,131.6 ; J6.2 206.98,131.6 ; J6.2 209.21,133.82
  BOTTOM w0.381: C59.2 161.35,113.88 162.45,113.88 C67.2 162.45,113.53 162.45,113.03 v1(162.29,112.87) ; v1(164.71,112.87) 164.71,113.12 164.38,113.45 C68.2 164.56,113.89 165.64,113.89 C60.2
  BOTTOM w0.889: C50.2 206.25,130.87 J6.2
  vias: v1(19.98,146.76) v1(19.98,144.22) v1(19.98,141.68) v1(19.98,139.14) v1(19.98,136.6) v1(19.98,134.06) v1(19.98,131.52) v1(19.98,128.98) v1(19.98,126.44) v1(19.98,123.9) v1(19.98,121.36) v1(19.98,118.82) v1(19.98,116.28) v1(19.98,113.74) v1(19.98,111.2) v1(19.98,108.66) v1(19.98,106.12) v1(19.98,103.58) v1(19.98,101.04) v1(19.98,98.5) v1(19.98,95.96) v1(19.98,93.42) v1(19.98,90.88) v1(19.98,88.34) v1(19.98,85.8) v1(19.98,83.26) v1(19.98,80.72) v1(19.98,78.18) v1(19.98,75.64) v1(19.98,73.1) v1(19.98,70.56) v1(19.98,68.02) v1(19.98,65.48) v1(19.98,62.94) v1(19.98,60.4) v1(19.98,57.86) v1(19.98,55.32) v1(19.98,52.78) v1(19.98,50.24) v1(19.98,47.7) v1(19.98,45.16) v1(19.98,42.62) v1(19.98,40.08) v1(19.98,37.54) v1(19.98,35) v1(19.98,32.46) v1(19.98,29.92) v1(19.98,27.38) v1(19.98,24.84) v1(19.98,22.3) v1(19.98,19.76) v1(21.25,150.57) v1(21.25,148.03) v1(21.25,145.49) v1(21.25,142.95) v1(21.25,140.41) v1(21.25,137.87) v1(21.25,135.33) v1(21.25,132.79) v1(21.25,130.25) v1(21.25,127.71) v1(21.25,125.17) v1(21.25,122.63) v1(21.25,120.09) v1(21.25,117.55) v1(21.25,115.01) v1(21.25,112.47) v1(21.25,109.93) v1(21.25,107.39) v1(21.25,104.85) v1(21.25,102.31) v1(21.25,99.77) v1(21.25,97.23) v1(21.25,94.69) v1(21.25,92.15) v1(21.25,89.61) v1(21.25,87.07) v1(21.25,84.53) v1(21.25,81.99) v1(21.25,79.45) v1(21.25,76.91) v1(21.25,74.37) v1(21.25,71.83) v1(21.25,69.29) v1(21.25,66.75) v1(21.25,64.21) v1(21.25,61.67) v1(21.25,59.13) v1(21.25,56.59) v1(21.25,54.05) v1(21.25,51.51) v1(21.25,48.97) v1(21.25,46.43) v1(21.25,43.89) v1(21.25,41.35) v1(21.25,38.81) v1(21.25,36.27) v1(21.25,33.73) v1(21.25,31.19) v1(21.25,28.65) v1(21.25,26.11) v1(21.25,23.57) v1(21.25,21.03) v1(21.25,18.49) v1(22.52,19.76) v1(23.79,150.57) v1(23.79,18.49) v1(25.06,149.3) v1(25.06,19.76) v1(26.33,150.57) v1(26.33,18.49) v1(27.6,149.3) v1(27.6,19.76) v1(28.87,150.57) v1(28.87,18.49) v1(30.14,149.3) v1(30.14,19.76) v1(31.41,150.57) v1(31.41,18.49) v1(32.68,149.3) v1(32.68,19.76) v1(33.95,150.57) v1(33.95,18.49) v1(35.22,149.3) v1(35.22,19.76) v1(36.49,150.57) v1(36.49,18.49) v1(37.76,149.3) v1(37.76,19.76) v1(39.03,150.57) v1(39.03,18.49) v1(40.3,149.3) v1(40.3,19.76) v1(41.57,150.57) v1(41.57,18.49) v1(42.84,149.3) v1(42.84,19.76) v1(44.11,150.57) v1(44.11,18.49) v1(45.38,19.76) v1(46.65,150.57) v1(46.65,18.49) v1(47.92,19.76) v1(49.19,150.57) v1(49.19,18.49) v1(50.46,149.3) v1(50.46,19.76) v1(51.73,150.57) v1(51.73,18.49) v1(53,149.3) v1(53,19.76) v1(54.27,150.57) v1(54.27,18.49) v1(55.54,149.3) v1(55.54,19.76) v1(56.81,150.57) v1(56.81,18.49) v1(58.08,149.3) v1(58.08,19.76) v1(59.35,150.57) v1(59.35,18.49) v1(60.62,149.3) v1(60.62,19.76) v1(61.89,150.57) v1(61.89,18.49) v1(63.16,19.76) v1(64.43,150.57) v1(64.43,18.49) v1(65.7,19.76) v1(66.97,150.57) v1(66.97,18.49) v1(68.24,19.76) v1(69.51,150.57) v1(69.51,18.49) v1(70.78,149.3) v1(70.78,19.76) v1(72.05,150.57) v1(72.05,18.49) v1(73.32,149.3) v1(73.32,19.76) v1(74.59,150.57) v1(74.59,18.49) v1(75.86,149.3) v1(75.86,19.76) v1(77.13,150.57) v1(77.13,18.49) v1(78.4,149.3) v1(78.4,19.76) v1(79.67,150.57) v1(79.67,18.49) v1(80.94,149.3) v1(80.94,19.76) v1(82.21,150.57) v1(82.21,18.49) v1(83.48,19.76) v1(84.75,150.57) v1(84.75,18.49) v1(86.02,149.3) v1(86.02,19.76) v1(87.29,150.57) v1(87.29,18.49) v1(88.56,149.3) v1(88.56,19.76) v1(89.83,150.57) v1(89.83,18.49) v1(91.1,149.3) v1(91.1,19.76) v1(92.37,150.57) v1(92.37,18.49) v1(93.64,149.3) v1(93.64,19.76) v1(94.91,150.57) v1(94.91,18.49) v1(96.18,149.3) v1(96.18,19.76) v1(97.45,150.57) v1(97.45,18.49) v1(98.72,149.3) v1(98.72,19.76) v1(99.99,150.57) v1(99.99,18.49) v1(101.26,149.3) v1(101.26,19.76) v1(102.53,150.57) v1(102.53,18.49) v1(103.8,149.3) v1(103.8,19.76) v1(105.07,150.57) v1(105.07,18.49) v1(106.34,149.3) v1(106.34,146.76) v1(106.34,144.22) v1(106.34,141.68) v1(106.34,139.14) v1(106.34,136.6) v1(106.34,134.06) v1(106.34,131.52) v1(106.34,128.98) v1(106.34,126.44) v1(106.34,123.9) v1(106.34,121.36) v1(106.34,118.82) v1(106.34,116.28) v1(106.34,113.74) v1(106.34,111.2) v1(106.34,108.66) v1(106.34,106.12) v1(106.34,103.58) v1(106.34,101.04) v1(106.34,98.5) v1(106.34,95.96) v1(106.34,93.42) v1(106.34,90.88) v1(106.34,88.34) v1(106.34,85.8) v1(106.34,83.26) v1(106.34,80.72) v1(106.34,78.18) v1(106.34,75.64) v1(106.34,73.1) v1(106.34,70.56) v1(106.34,68.02) v1(106.34,65.48) v1(106.34,62.94) v1(106.34,60.4) v1(106.34,57.86) v1(106.34,55.32) v1(106.34,52.78) v1(106.34,50.24) v1(106.34,47.7) v1(106.34,45.16) v1(106.34,42.62) v1(106.34,40.08) v1(106.34,37.54) v1(106.34,35) v1(106.34,32.46) v1(106.34,29.92) v1(106.34,27.38) v1(106.34,24.84) v1(106.34,22.3) v1(106.34,19.76) v1(107.61,150.57) v1(107.61,148.03) v1(107.61,145.49) v1(107.61,142.95) v1(107.61,140.41) v1(107.61,137.87) v1(107.61,135.33) v1(107.61,132.79) v1(107.61,130.25) v1(107.61,127.71) v1(107.61,125.17) v1(107.61,122.63) v1(107.61,120.09) v1(107.61,117.55) v1(107.61,115.01) v1(107.61,112.47) v1(107.61,109.93) v1(107.61,107.39) v1(107.61,104.85) v1(107.61,102.31) v1(107.61,99.77) v1(107.61,97.23) v1(107.61,94.69) v1(107.61,92.15) v1(107.61,89.61) v1(107.61,87.07) v1(107.61,84.53) v1(107.61,81.99) v1(107.61,79.45) v1(107.61,76.91) v1(107.61,74.37) v1(107.61,71.83) v1(107.61,69.29) v1(107.61,66.75) v1(107.61,64.21) v1(107.61,61.67) v1(107.61,59.13) v1(107.61,56.59) v1(107.61,54.05) v1(107.61,51.51) v1(107.61,48.97) v1(107.61,46.43) v1(107.61,41.35) v1(107.61,38.81) v1(107.61,36.27) v1(107.61,33.73) v1(107.61,31.19) v1(107.61,28.65) v1(107.61,26.11) v1(107.61,23.57) v1(107.61,21.03) v1(107.61,18.49) v1(113.5,9.35) v1(113.49,8.59) v1(115.48,19.31) v1(115.48,18.23) v1(115.48,17.15) v1(115.49,5.38) v1(115.65,9.47) v1(116.68,19.31) v1(116.68,18.23) v1(116.68,17.15) v1(117.75,9.43) v1(117.89,19.31) v1(117.89,18.23) v1(117.89,17.15) v1(117.84,5.34) v1(119.9,9.3) v1(119.89,8.55) v1(126.74,120.1) v1(128.21,120.1) v1(129.68,120.1) v1(130.68,41.19) v1(130.68,40.24) v1(131.64,41.19) v1(131.64,40.24) v1(131.89,112.99) v1(131.89,112.13) v1(131.89,111.28) v1(131.89,110.43) v1(132.7,112.99) v1(132.7,112.13) v1(132.7,111.28) v1(132.7,110.43) v1(141.65,115.41) v1(142.27,71.6) v1(143.14,118.93) v1(143.14,111.89) v1(143.54,72.87) v1(144.64,115.41) v1(144.81,71.6) v1(146.08,72.87) v1(147.35,71.6) v1(148.62,72.87) v1(149.89,71.6) v1(151.16,72.87) v1(152.43,71.6) v1(153.7,72.87) v1(154.97,71.6) v1(156.24,72.87) v1(157.51,71.6) v1(158.78,72.87) v1(162.29,111.72) v1(162.29,110.56) v1(162.26,80.44) v1(162.27,78.01) v1(163.5,112.87) v1(163.5,111.72) v1(163.5,110.56) v1(164.71,111.72) v1(164.71,110.56) v1(171.73,112.92) v1(171.74,109.5) v1(173.22,116.44) v1(173.22,109.4) v1(174.71,112.92) v1(188.05,38.06) v1(188.05,36.86) v1(188.05,35.65) v1(189.26,38.06) v1(189.26,36.86) v1(189.26,35.65) v1(190.46,38.06) v1(190.46,36.86) v1(190.46,35.65) v1(199.48,24.5) v1(201,24.5) v1(202.78,24.5) v1(203.18,111.48) v1(203.18,108.74) v1(203.18,107.69) v1(203.18,104.95) v1(203.74,52.04) v1(203.74,50.83) v1(204.03,68.31) v1(204.03,67.11) v1(204.95,53.24) v1(204.95,52.04) v1(204.95,50.83) v1(205.24,69.52) v1(205.24,68.31) v1(205.24,67.11) v1(206.15,52.04) v1(206.15,50.83) v1(206.45,68.31) v1(206.45,67.11) v2(151.79,41.69) v2(151.79,39.79) v2(153.75,41.7) v2(153.75,39.27) v2(180.7,34.73) v2(180.7,33.46) v2(180.7,30.92) v2(181.97,33.46) v2(181.97,30.92) v2(182.14,53.31) v2(182.14,52.04) v2(182.14,50.77) v2(182.43,69.58) v2(182.43,68.31) v2(182.43,67.04) v2(183.41,53.31) v2(183.41,52.04) v2(183.41,50.77) v2(183.7,69.58) v2(183.7,68.31) v2(183.7,67.04) v2(205.59,47.69) v2(205.59,46.42) v2(205.59,45.15) v2(205.59,43.88) v2(205.88,63.97) v2(205.88,62.7) v2(205.88,61.43) v2(205.88,60.16) v2(215.18,34.29) v2(215.18,33.02) v2(216.45,35.56) v2(216.45,34.29) v2(216.45,33.02) v3(163.99,56.08) v3(163.99,55.06) v3(164.01,52.07) v3(164.01,51.05) v3(164.01,50.03) v3(165,56.08) v3(165,55.06) v3(165.03,52.07) v3(165.03,51.05) v3(165.03,50.03)
